# Altium PCB PCB2.PcbDoc (part 1 of 3)
Units mm, origin at the board's own origin, x right, y up, seen from the top; angles counter-clockwise.
Board outline 98.9 x 50 mm, 4 copper layers (Top Copper, Signal Layer 1, Signal Layer 2, Bottom Copper), stack 1.564 mm thick; 154 components, 109 nets, 647 pads, 921 vias.
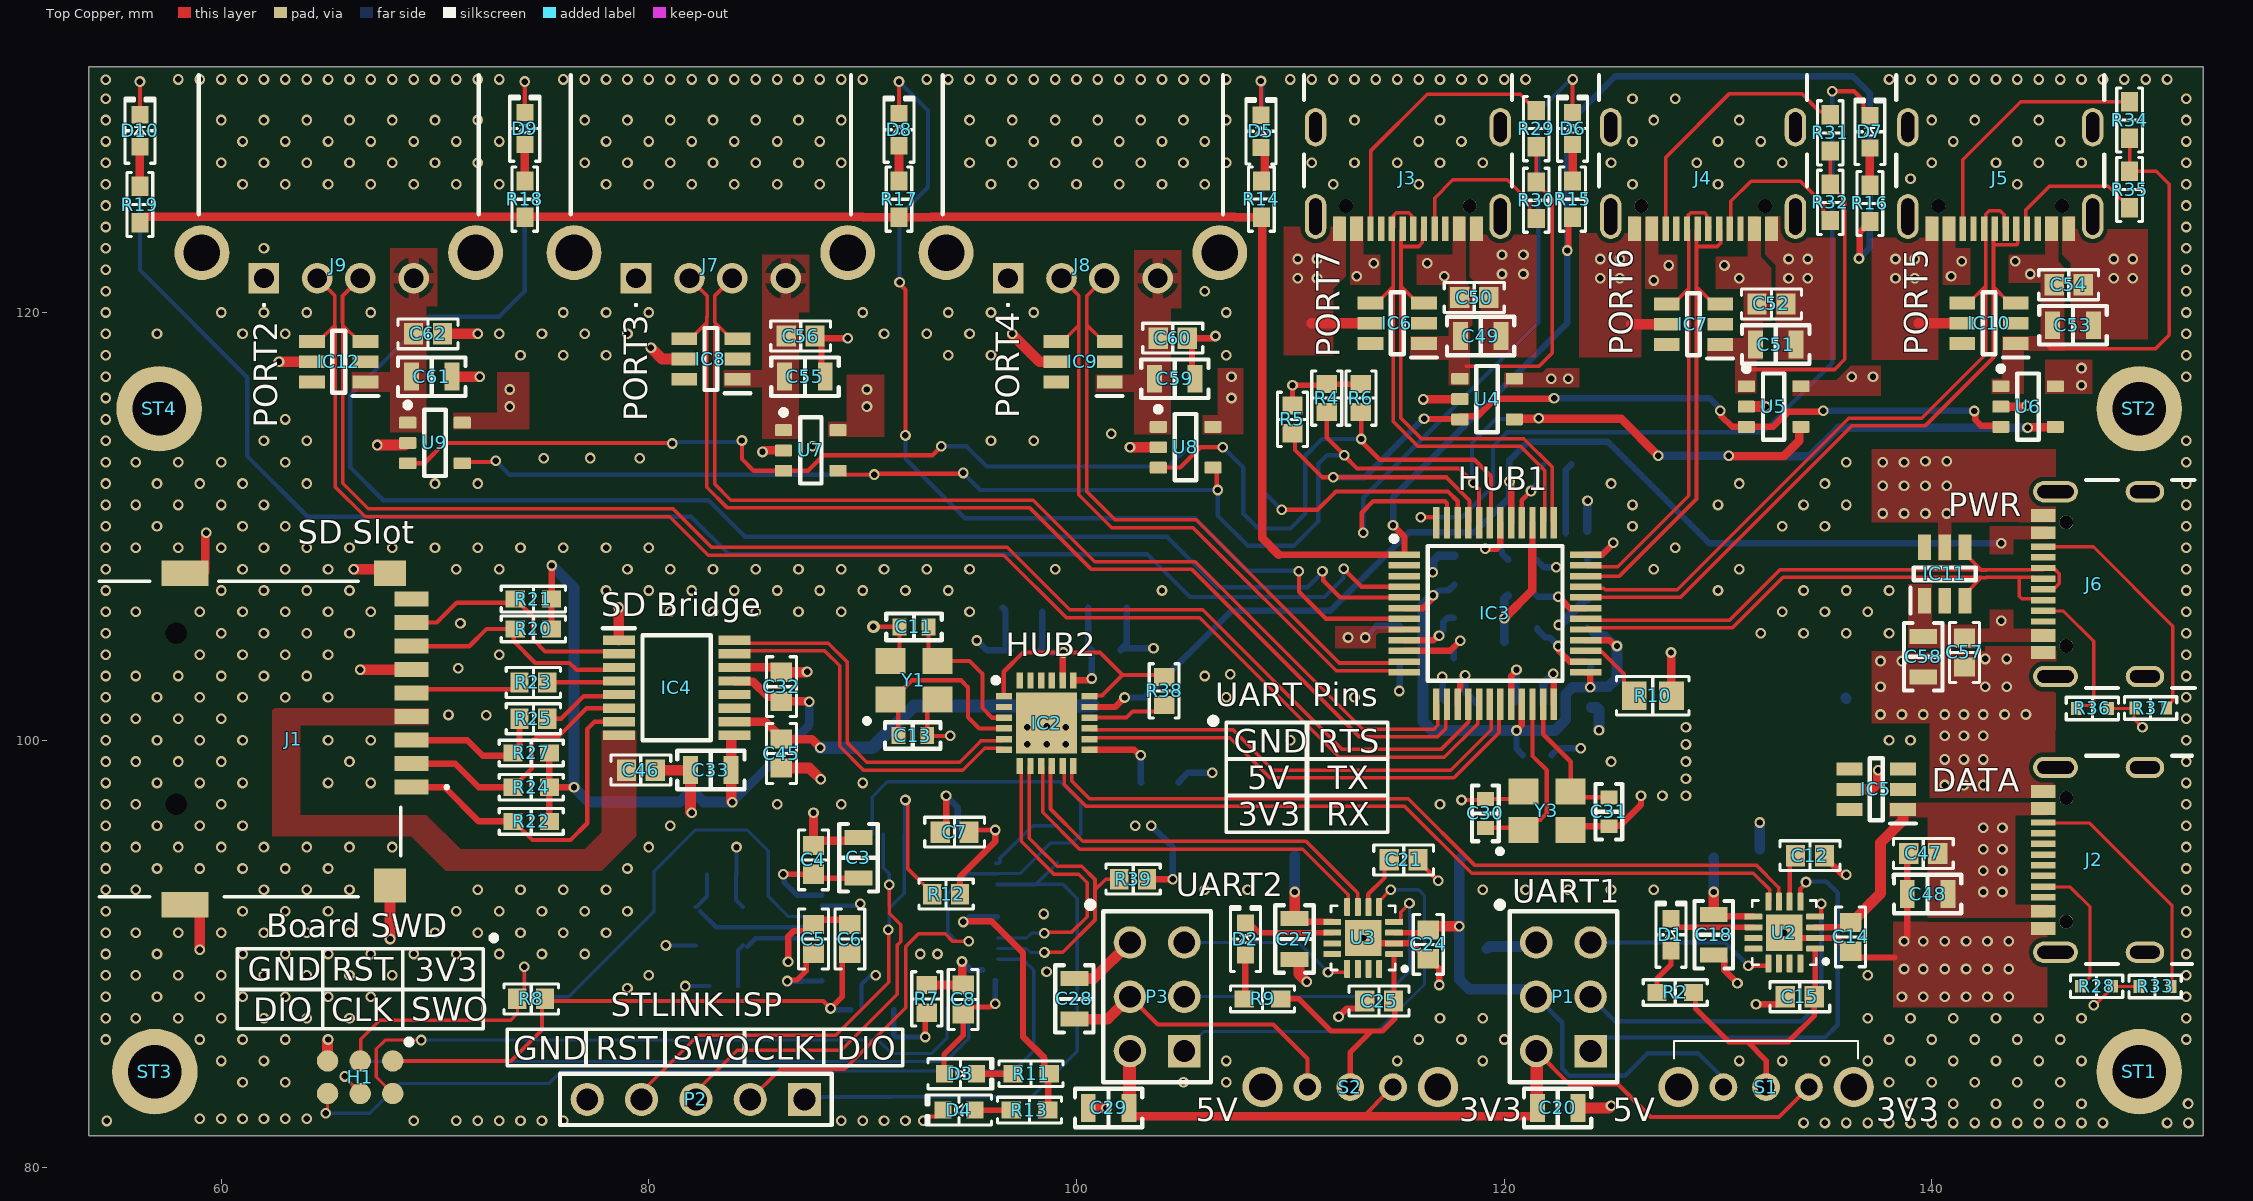
[diagram p0: Top Copper view]
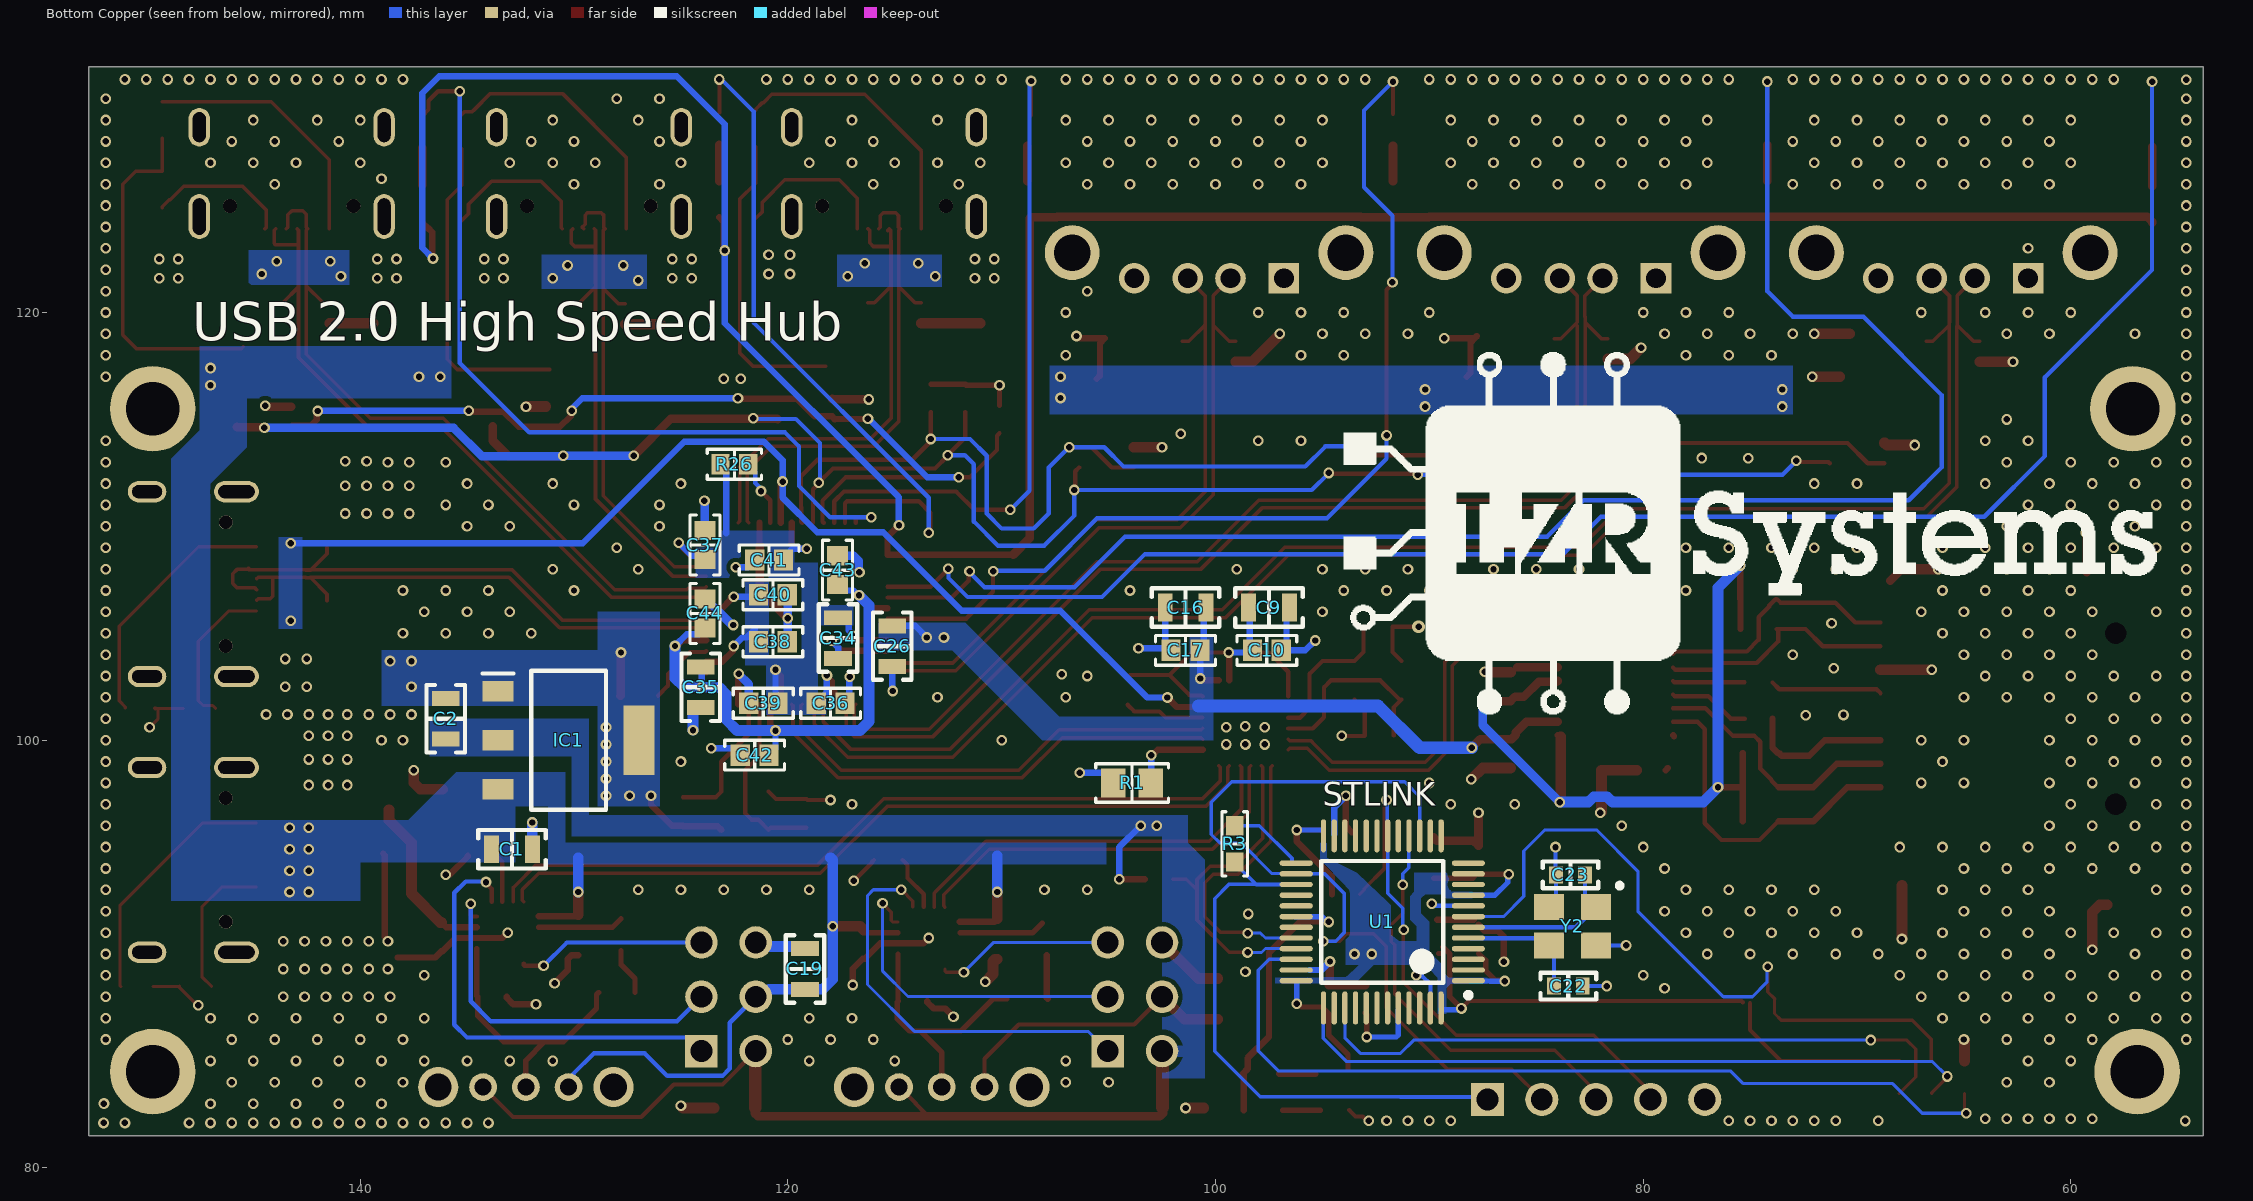
[diagram p1: Bottom Copper view, seen from below]
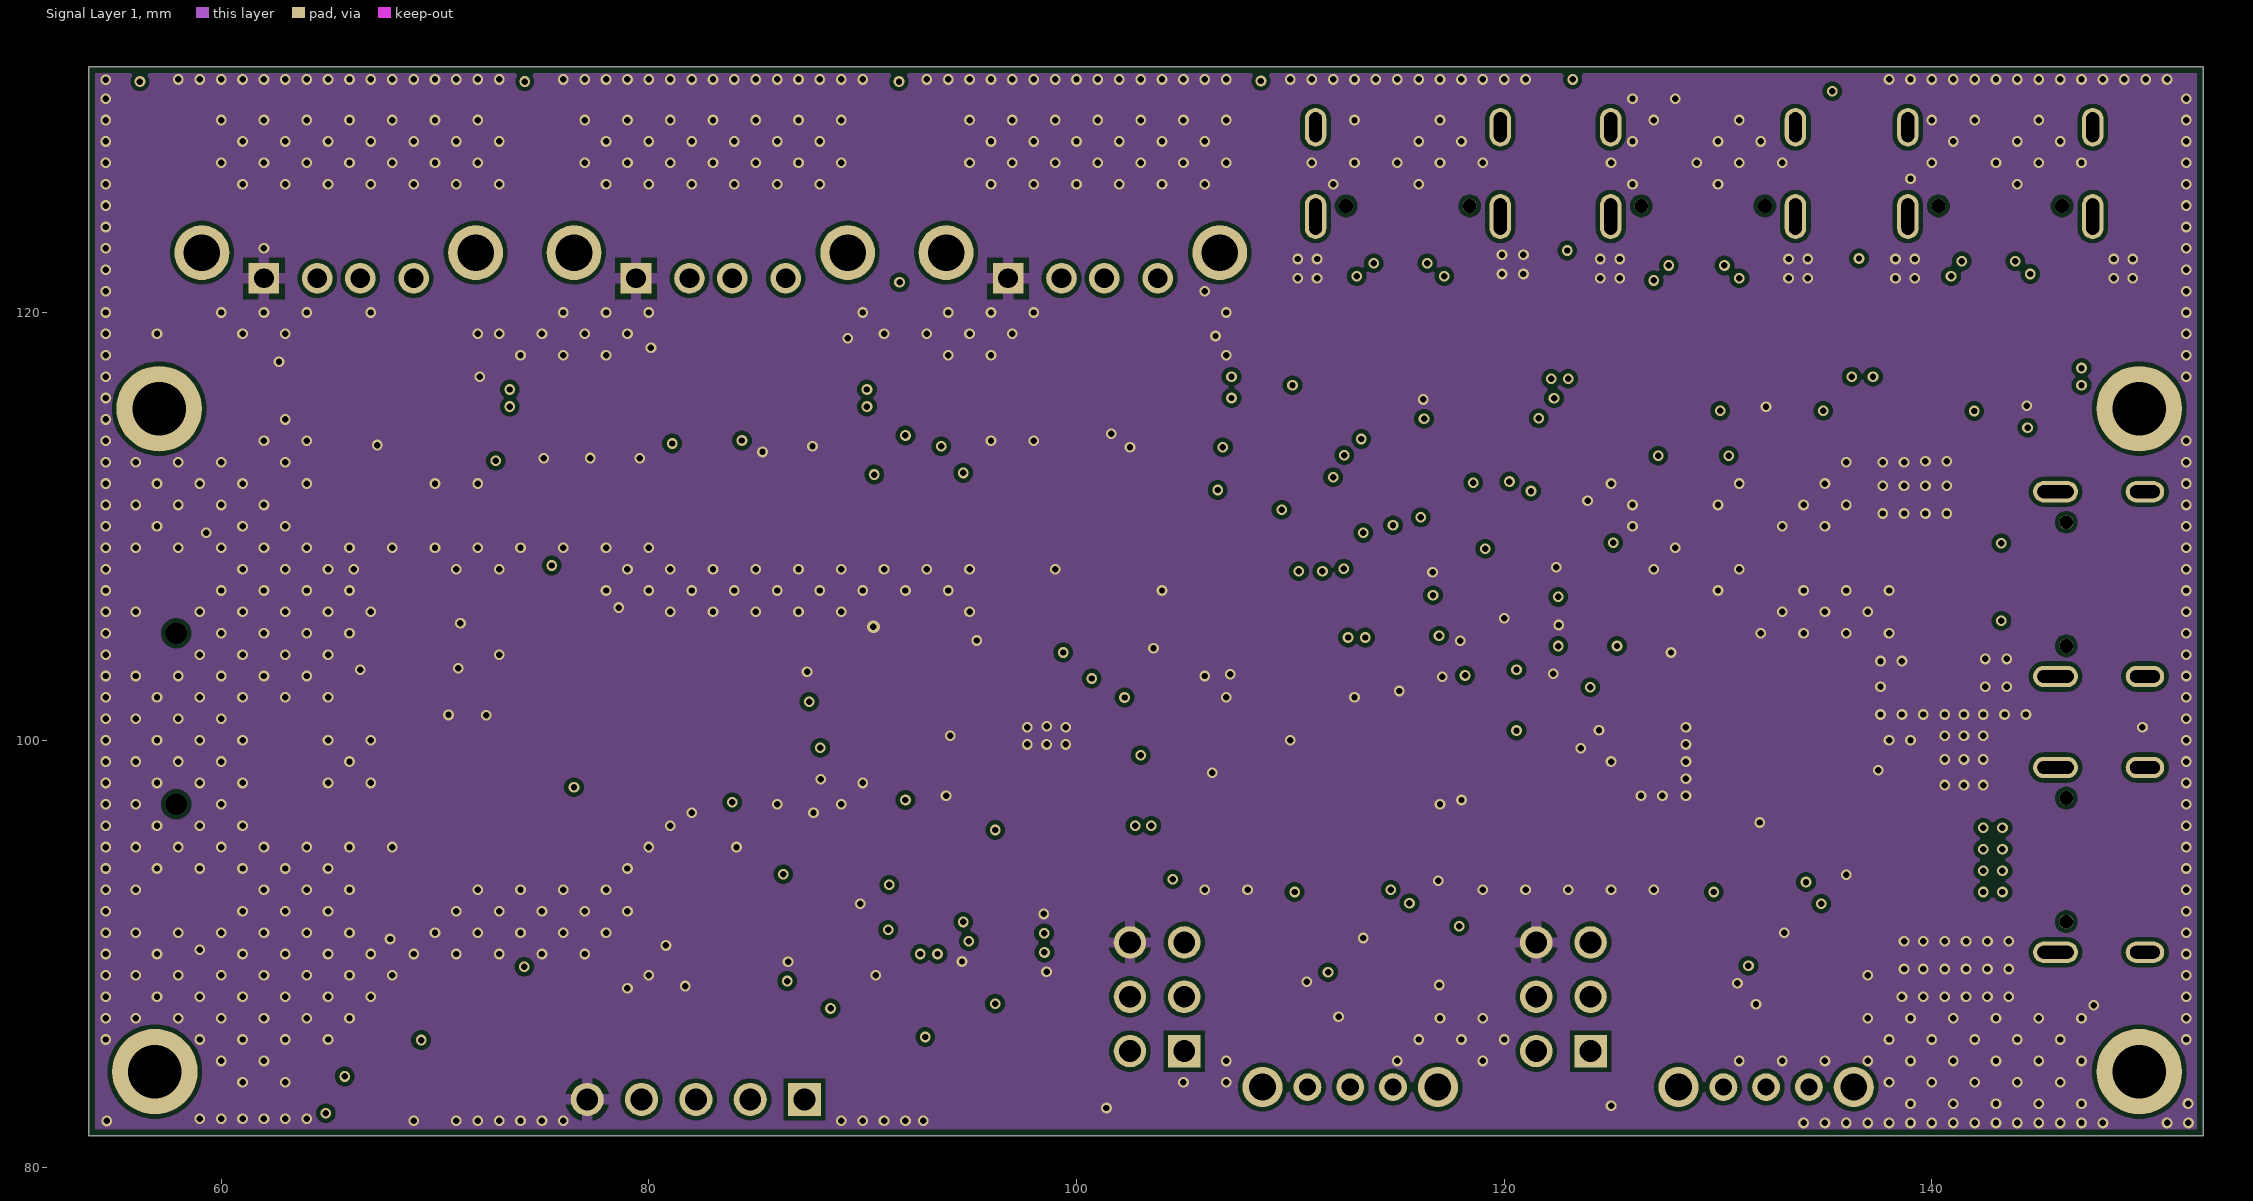
[diagram p2: Signal Layer 1]
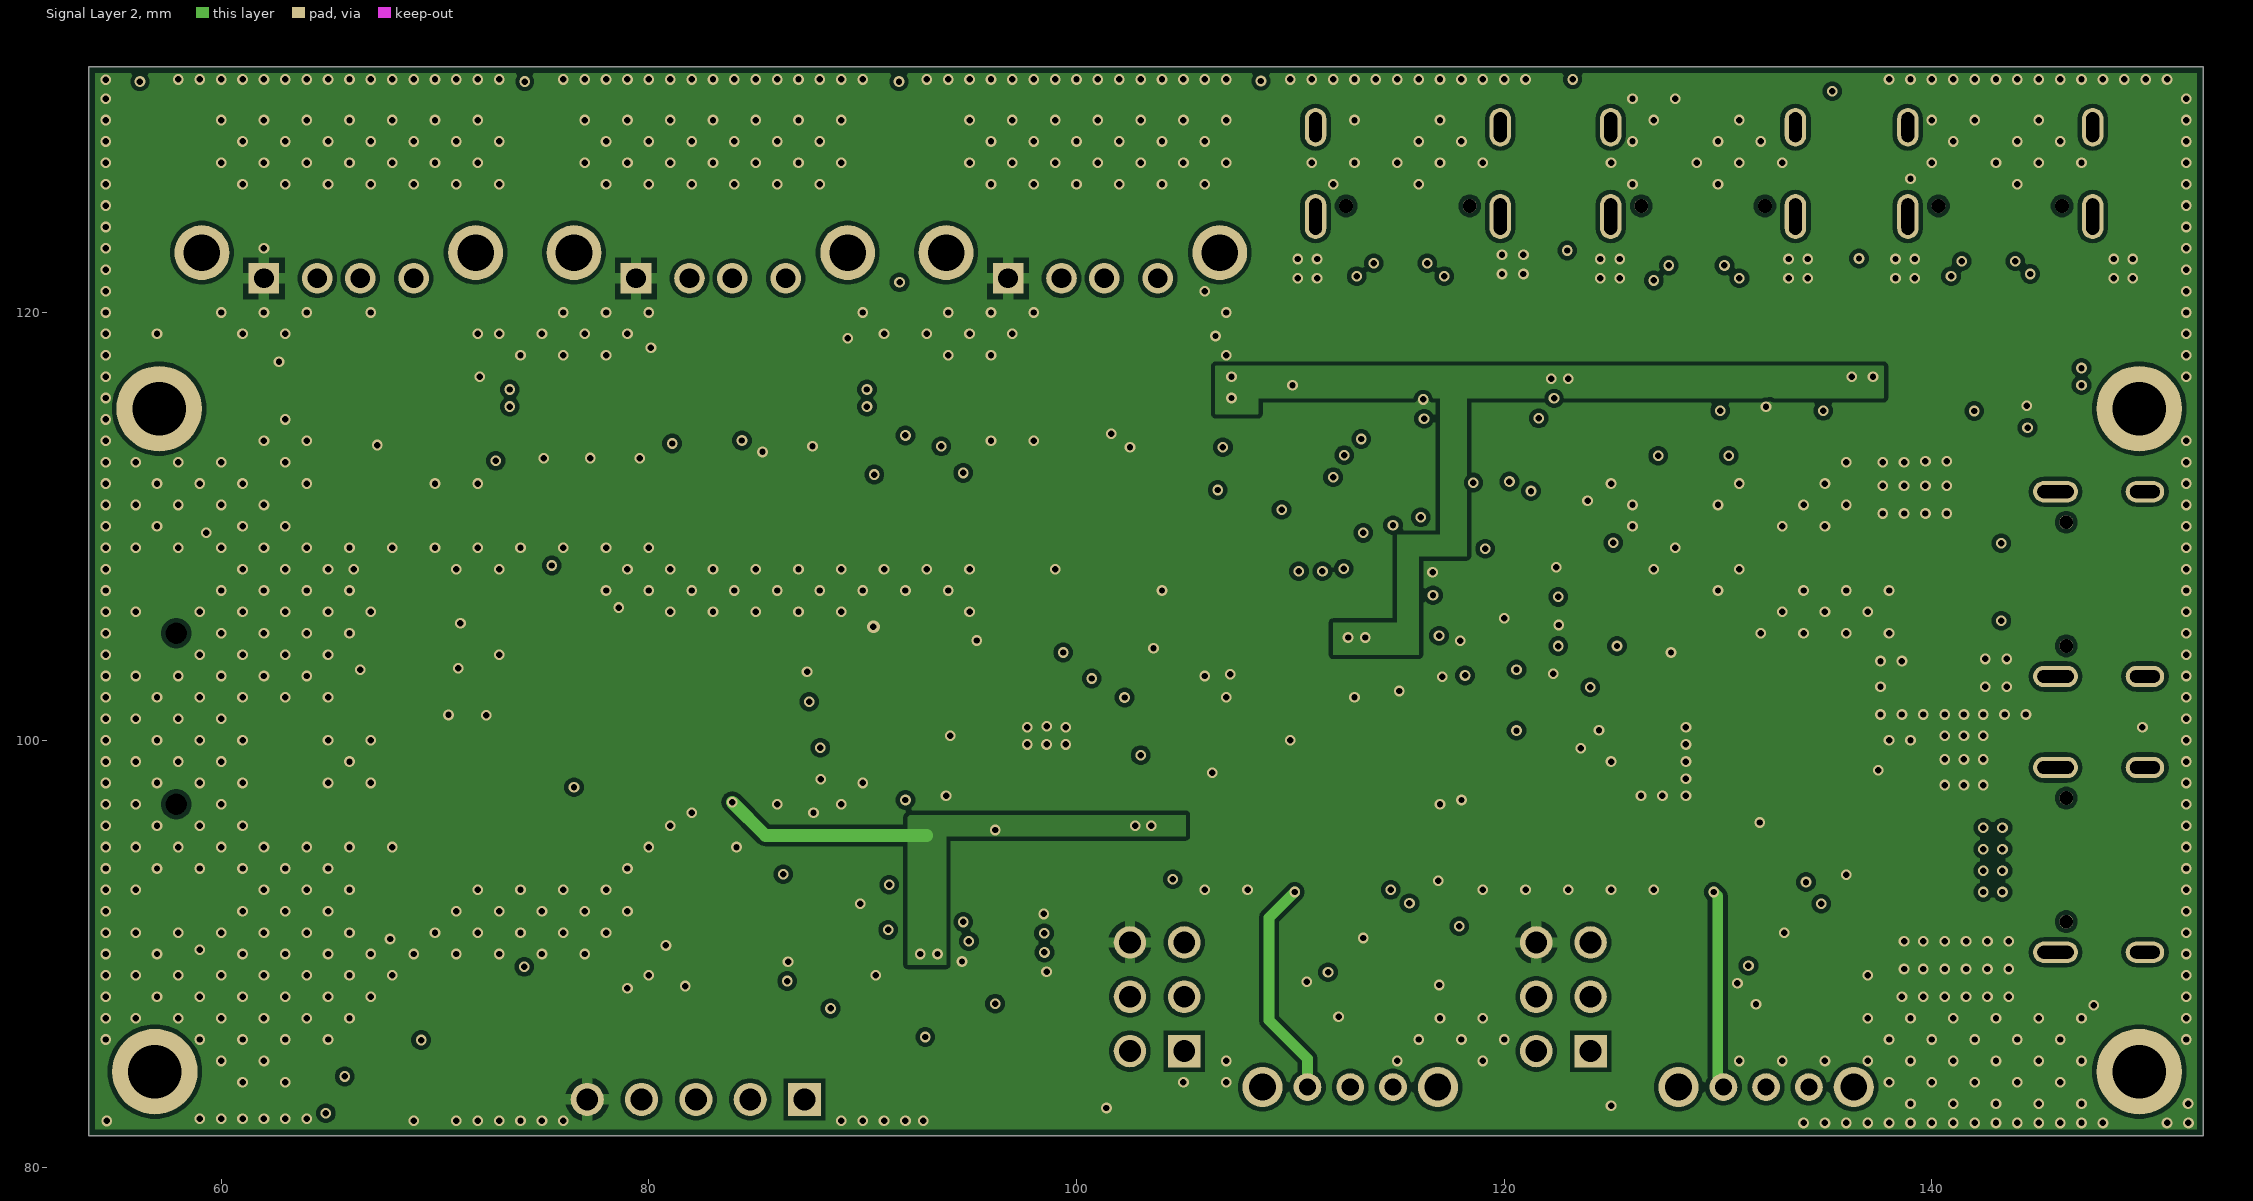
[diagram p3: Signal Layer 2]
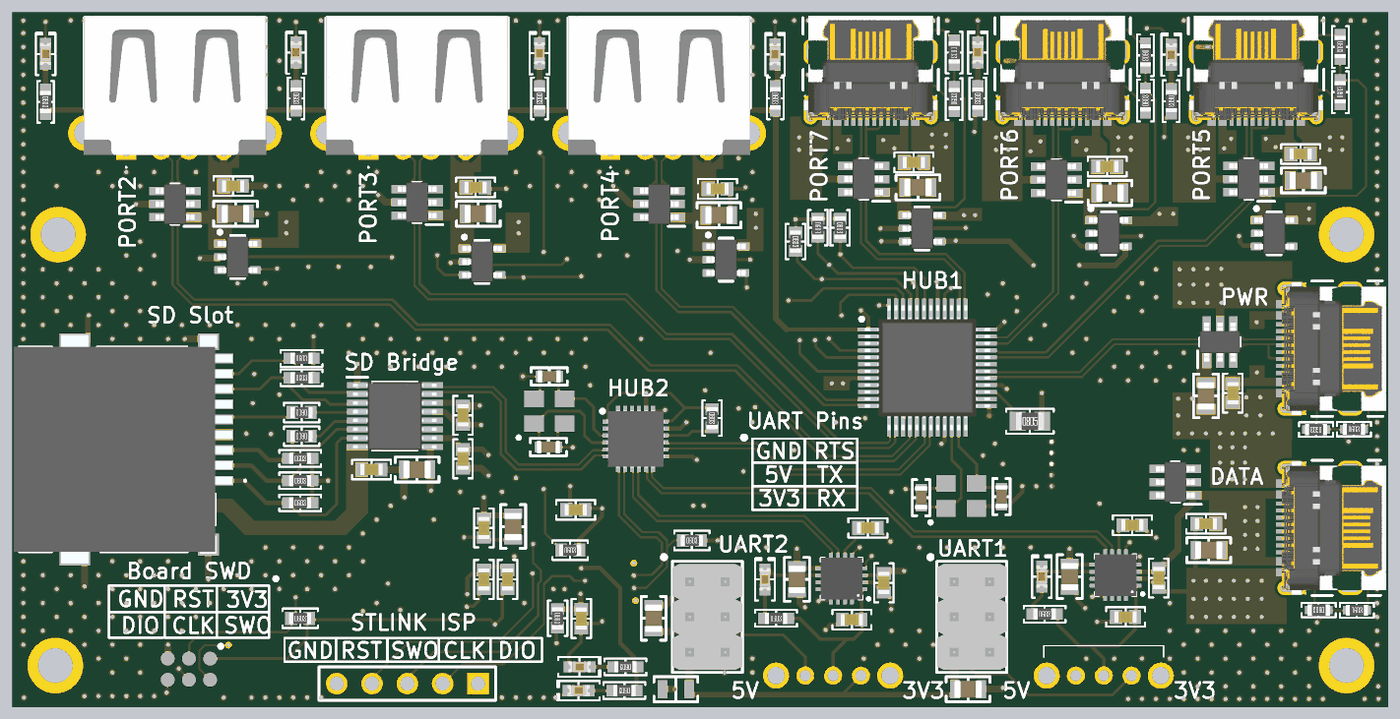
[diagram p5: 3D render of the assembled board from above, using the file's embedded part models]
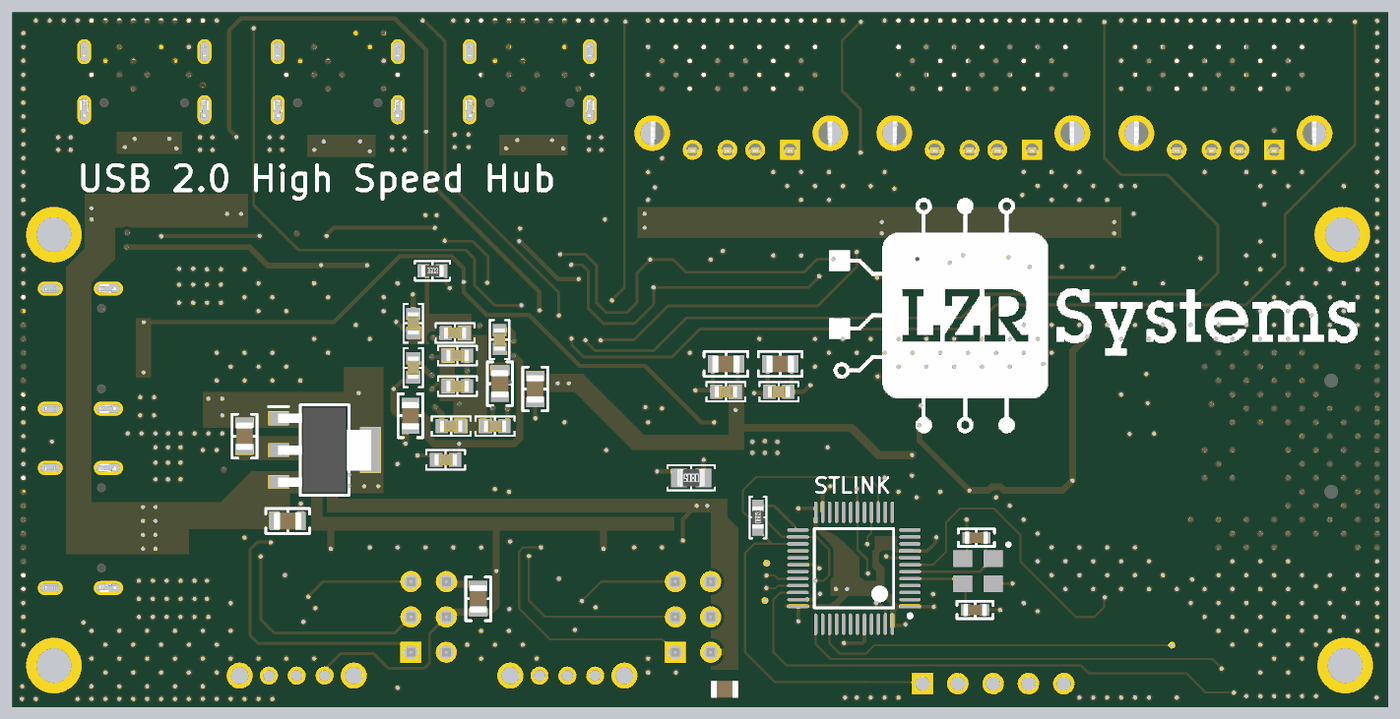
[diagram p6: 3D render of the assembled board from below, using the file's embedded part models]

## Layer stack, top to bottom
Top Mask: solder mask 0.015, Solder Resist, Dk 3.8
Top Copper: signal copper 0.035
Dielectric 1: prepreg 0.0994, 3313, Dk 4.05
Signal Layer 1: signal copper 0.0152
Core: core 1.265, FR-4, Dk 4.5
Signal Layer 2: signal copper 0.0152
Dielectric 2: prepreg 0.0994, 3313, Dk 4.05
Bottom Copper: signal copper 0.035
Bottom Mask: solder mask 0.015, Solder Resist, Dk 3.8

## Board outline
53.8,81.5 53.8,131.5 152.7,131.5 152.7,81.5

## Design rules (kind name [scope] priority, off if disabled: settings)
BoardOutlineClearance [All] p1: gap=0.3 ignorepadtopadclearanceinfootprint=FALSE except(0.4: Arc-SplitBarrior Arc-SplitContinuation Track-SplitBarrior Track-SplitContinuation SMDPad-SplitBarrior SMDPad-SplitContinuation THPad-SplitBarrior THPad-SplitContinuation Via-SplitBarrior Via-SplitContinuation Fill-SplitBarrior Fill-SplitContinuation Poly-SplitBarrior Poly-SplitContinuation Region-SplitBarrior Region-SplitContinuation Text-SplitBarrior Text-SplitContinuation)
Clearance "Clearance Different Nets" [All] p1: gap=0.2 ignorepadtopadclearanceinfootprint=FALSE except(0.089: Arc-Arc Arc-Track Arc-SMDPad Track-Track Track-SMDPad; 0.127: SMDPad-SMDPad SMDPad-Via THPad-Via Via-Via; 0.254: Arc-Via Arc-Text Track-Via Track-Text SMDPad-Text THPad-Text Via-Text Fill-Text Poly-Text Region-Text Text-Text; 0.5: THPad-THPad Via-Hole)
Clearance "Clearance Same Nets" [All] p2: gap=0.2 ignorepadtopadclearanceinfootprint=TRUE except(0: SMDPad-Via SMDPad-Hole; 0.089: Arc-Arc Arc-Track Arc-SMDPad Track-Track Track-SMDPad SMDPad-SMDPad; 0.127: THPad-Via; 0.254: Arc-Via Arc-Text Track-Via Track-Text SMDPad-Text THPad-Text Via-Via Via-Text Fill-Text Poly-Text Region-Text Text-Text)
Clearance "Clearance Bottom Layer" [OnLayer('Bottom Layer')] p3: gap=0.203 ignorepadtopadclearanceinfootprint=TRUE except(0.254: Arc-Text Track-Text SMDPad-Text THPad-Text Via-Text Fill-Text Poly-Text Region-Text Text-Text)
Clearance "Clearance Top Layer" [OnLayer('Top Layer')] p4: gap=0.203 ignorepadtopadclearanceinfootprint=TRUE except(0.254: Arc-Text Track-Text SMDPad-Text THPad-Text Via-Text Fill-Text Poly-Text Region-Text Text-Text)
DiffPairsRouting [All] p1: maxlimit=0.25 minlimit=0.127 mostfreqgap=0.127 toplayer_mingap=0.2 toplayer_prefgap=0.2 toplayer_minwidth=0.166 toplayer_maxwidth=0.17 toplayer_prefwidth=0.166 midlayer1_maxgap=0.127 midlayer1_minwidth=0.11 midlayer1_maxwidth=0.11 midlayer1_prefwidth=0.11 midlayer2_maxgap=0.127 midlayer2_minwidth=0.11 midlayer2_maxwidth=0.11 midlayer2_prefwidth=0.11 bottomlayer_maxgap=0.127 bottomlayer_minwidth=0.138 bottomlayer_maxwidth=0.138 bottomlayer_prefwidth=0.138 impedanceprofiledriven=TRUE impedanceprofileid={169C7CBD-F770-4E2C-8503-F8C298803404} impedanceprofilevalue=90.000000 maxuncoupledlength=30
HoleSize [All] p1: absolutevalues=TRUE maxlimit=6.3 minlimit=0.2 maxpercent=80.000 minpercent=20.000
MinimumAnnularRing [All] p1: minimumring=0.01
MinimumSolderMaskSliver [All] p1: minsoldermaskwidth=0.1
PolygonConnect PolygonConnect_1 [All] p1: thpad.connectstyle=Relief thpad.reliefconductorwidth=0.508 thpad.reliefentries=4 thpad.polygonreliefangle="90 Angle" thpad.airgapwidth=0.254 smdpad.connectstyle=Direct smdpad.reliefconductorwidth=0.508 smdpad.reliefentries=4 smdpad.polygonreliefangle="90 Angle" smdpad.airgapwidth=0.254 via.connectstyle=Direct via.reliefconductorwidth=0.508 via.reliefentries=4 via.polygonreliefangle="90 Angle" via.airgapwidth=0.254
RoutingCorners [All] p1: cornerstyle=Round minsetback=2.54 maxsetback=2.54
RoutingVias [All] p1: holewidth=0.5 width=1 viastyle="Through Hole" minholewidth=0.2 minwidth=0.35 maxholewidth=1 maxwidth=2
SilkToSilkClearance [All] p1: silktosilkclearance=0.1
SilkToSolderMaskClearance [IsPad] p1: minsilkscreentomaskgap=0.1 clearancetoexposedcopper=TRUE
SolderMaskExpansion [All] p1: expansion=0.03 istentingtop=FALSE
SupplyNets "Schematic Supply Nets_10" [InNet('+3V3')] p1: voltage=0.000
SupplyNets "Schematic Supply Nets_9" [InNet('GND')] p2: voltage=0.000
SupplyNets "Schematic Supply Nets_8" [InNet('+VCARD')] p3: voltage=0.000
SupplyNets "Schematic Supply Nets_7" [InNet('+5V_PORT6')] p4: voltage=0.000
SupplyNets "Schematic Supply Nets_6" [InNet('+5V_PORT2')] p5: voltage=0.000
SupplyNets "Schematic Supply Nets_5" [InNet('+5V_PORT3')] p6: voltage=0.000
SupplyNets "Schematic Supply Nets_4" [InNet('+5V_PORT7')] p7: voltage=0.000
SupplyNets "Schematic Supply Nets_3" [InNet('+5V_UPSTREAM')] p8: voltage=0.000
SupplyNets "Schematic Supply Nets_2" [InNet('+5V_PORT5')] p9: voltage=0.000
SupplyNets "Schematic Supply Nets_1" [InNet('+5V_PORT4')] p10: voltage=0.000
SupplyNets "Schematic Supply Nets" [InNet('+5V')] p11: voltage=0.000
Width [All] p1: maxlimit=2.54 minlimit=0.089 preferedwidth=0.381
24 further rules are at their usual default settings.

## Classes and differential pairs
component class U_Connectors: C47 C48 C49 C50 C51 C52 C53 C54 C55 C56 C57 C58 C59 C60 C61 C62 IC5 IC6 IC7 IC8 IC9 IC10 IC11 IC12 J2 J3 J4 J5 J6 J7 J8 J9 R28 R29 R30 R31 R32 R33 R34 R35 R36 R37 U4 U5 U6 U7 U8 U9
component class Main: C1 C2 C3 C4 C5 C6 C7 C8 C9 C10 C11 C12 C13 C14 C15 C16 C17 C18 C19 C20 C21 C22 C23 C24 C25 C26 C27 C28 C29 C30 C31 C32 C33 C34 C35 C36 C37 C38 C39 C40 C41 C42 C43 C44 C45 C46 D1 D2 D3 D4 D5 D6 D7 D8 D9 D10 H1 IC1 IC2 IC3 IC4 J1 P1 P2 P3 R1 R2 R3 R4 R5 R6 R7 R8 R9 R10 R11 R12 R13 R14 R15 R16 R17 R18 R19 R20 R21 R22 R23 R24 R25 R26 R27 R38 R39 S1 S2 ST1 ST2 ST3 ST4 U1 U2 U3 Y1 Y2 Y3
differential pair P11_D: +P11_D_P -P11_D_N
differential pair UP_D: +UP_D_P -UP_D_N
differential pair P10_D: +P10_D_P -P10_D_N
differential pair P9_D: +P9_D_P -P9_D_N
differential pair P8_D: +P8_D_P -P8_D_N
differential pair P7_D: +P7_D_P -P7_D_N
differential pair P6_D: +P6_D_P -P6_D_N
differential pair P5_D: +P5_D_P -P5_D_N
differential pair P4_D: +P4_D_P -P4_D_N
differential pair P3_D: +P3_D_P -P3_D_N
differential pair P2_D: +P2_D_P -P2_D_N
differential pair P1_D: +P1_D_P -P1_D_N

## Components (designator, comment, footprint, x,y, rotation, side; value= is the part's Value field where it differs from the comment)
C1 "10 µF" "MURATA GRM21B 0805_2012" 132.9,94.9 r0 bottom
C2 "10 µF" "MURATA GRM21B 0805_2012" 136,101 r270 bottom
C3 "10 µF" "MURATA GRM21B 0805_2012" 89.8,94.5 r270 top
C4 "0.1 µF" "CAP 0603_1608" 87.7,94.4 r270 top
C5 "0.1 µF" "CAP 0603_1608" 87.7,90.7 r270 top
C6 "0.1 µF" "CAP 0603_1608" 89.4,90.7 r270 top
C7 "0.1 µF" "CAP 0603_1608" 94.3,95.7 r0 top
C8 "0.1 µF" "CAP 0603_1608" 94.7,87.875 r270 top
C9 "10 µF" "MURATA GRM21B 0805_2012" 97.5,106.2 r0 bottom
C10 "0.1 µF" "CAP 0603_1608" 97.6,104.2 r180 bottom
C11 "10 pF" "MURATA GCM188 0603_1608" 92.4,105.3 r180 top
C12 "0.1 µF" "CAP 0603_1608" 134.3,94.6 r180 top
C13 "10 pF" "MURATA GCM188 0603_1608" 92.343,100.218 r0 top
C14 "0.1 µF" "CAP 0603_1608" 136.2,90.8 r90 top
C15 "0.1 µF" "CAP 0603_1608" 133.825,88 r180 top
C16 "10 µF" "MURATA GRM21B 0805_2012" 101.4,106.2 r180 bottom
C17 "0.1 µF" "CAP 0603_1608" 101.4,104.2 r0 bottom
C18 "10 µF" "MURATA GRM21B 0805_2012" 129.8,90.9 r90 top
C19 "10 µF" "MURATA GRM21B 0805_2012" 119.2,89.3 r270 bottom
C20 "10 µF" "MURATA GRM21B 0805_2012" 122.5,82.8 r180 top
C21 "0.1 µF" "CAP 0603_1608" 115.3,94.4 r180 top
C22 "10 pF" "MURATA GCM188 0603_1608" 83.5,88.5 r0 bottom
C23 "10 pF" "MURATA GCM188 0603_1608" 83.4,93.7 r180 bottom
C24 "0.1 µF" "CAP 0603_1608" 116.45,90.45 r90 top
C25 "0.1 µF" "CAP 0603_1608" 114.15,87.8 r180 top
C26 "10 µF" "MURATA GRM21B 0805_2012" 115.114,104.398 r90 bottom
C27 "10 µF" "MURATA GRM21B 0805_2012" 110.2,90.7 r90 top
C28 "10 µF" "MURATA GRM21B 0805_2012" 99.9,87.9 r270 top
C29 "10 µF" "MURATA GRM21B 0805_2012" 101.5,82.8 r0 top
C30 "10 pF" "MURATA GCM188 0603_1608" 119.125,96.575 r270 top
C31 "10 pF" "MURATA GCM188 0603_1608" 124.9,96.65 r90 top
C32 "0.1 µF" "CAP 0603_1608" 86.2,102.5 r270 top
C33 "10 µF" "MURATA GRM21B 0805_2012" 82.9,98.6 r0 top
C34 "10 µF" "MURATA GRM21B 0805_2012" 117.65,104.775 r90 bottom
C35 "10 µF" "MURATA GRM21B 0805_2012" 124.075,102.475 r90 bottom
C36 "0.1 µF" "CAP 0603_1608" 118,101.725 r180 bottom
C37 "0.1 µF" "CAP 0603_1608" 123.875,109.125 r90 bottom
C38 "0.1 µF" "CAP 0603_1608" 120.7,104.6 r180 bottom
C39 "0.1 µF" "CAP 0603_1608" 121.15,101.725 r0 bottom
C40 "0.1 µF" "CAP 0603_1608" 120.7,106.8 r180 bottom
C41 "0.1 µF" "CAP 0603_1608" 120.875,108.425 r0 bottom
C42 "0.1 µF" "CAP 0603_1608" 121.55,99.3 r0 bottom
C43 "0.1 µF" "CAP 0603_1608" 117.675,107.95 r90 bottom
C44 "0.1 µF" "CAP 0603_1608" 123.875,105.925 r90 bottom
C45 "0.1 µF" "CAP 0603_1608" 86.2,99.375 r90 top
C46 "0.1 µF" "CAP 0603_1608" 79.625,98.6 r180 top
C47 "0.1 µF" "CAP 0603_1608" 139.6,94.7 r0 top
C48 "10 µF" "MURATA GRM21B 0805_2012" 139.8,92.8 r0 top
C49 "10 µF" "MURATA GRM21B 0805_2012" 118.9,118.9 r180 top
C50 "0.1 µF" "CAP 0603_1608" 118.6,120.7 r180 top
C51 "10 µF" "MURATA GRM21B 0805_2012" 132.7,118.5 r180 top
C52 "0.1 µF" "CAP 0603_1608" 132.5,120.4 r180 top
C53 "10 µF" "MURATA GRM21B 0805_2012" 146.6,119.4 r180 top
C54 "0.1 µF" "CAP 0603_1608" 146.4,121.3 r180 top
C55 "10 µF" "MURATA GRM21B 0805_2012" 87.3,117 r180 top
C56 "0.1 µF" "CAP 0603_1608" 87.1,118.9 r180 top
C57 "0.1 µF" "CAP 0603_1608" 141.525,104.1 r90 top
C58 "10 µF" "MURATA GRM21B 0805_2012" 139.6,103.9 r90 top
C59 "10 µF" "MURATA GRM21B 0805_2012" 104.6,116.9 r180 top
C60 "0.1 µF" "CAP 0603_1608" 104.5,118.8 r180 top
C61 "10 µF" "MURATA GRM21B 0805_2012" 69.85,117 r180 top
C62 "0.1 µF" "CAP 0603_1608" 69.675,119 r180 top
D1 "RED" "LED 0603_1608 RED" 127.8,90.9 r90 top
D2 "RED" "LED 0603_1608 RED" 107.9,90.7 r90 top
D3 "GREEN" "LED 0603_1608 RED" 94.575,84.4 r0 top
D4 "RED" "LED 0603_1608 RED" 94.5,82.7 r180 top
D5 "GREEN" "LED 0603_1608 RED" 108.625,128.475 r90 top
D6 "GREEN" "LED 0603_1608 RED" 123.2,128.6 r90 top
D7 "GREEN" "LED 0603_1608 RED" 137.1,128.45 r90 top
D8 "GREEN" "LED 0603_1608 RED" 91.7,128.55 r90 top
D9 "GREEN" "LED 0603_1608 RED" 74.2,128.6 r90 top
D10 "GREEN" "LED 0603_1608 RED" 56.2,128.5 r90 top
H1 "6 pin pad" "6 pin pad-Footprint-1" 68.024,85 r270 top
IC1 "AMS1117-3.3" SOT229P700X180-4N 130.25,100 r180 bottom
IC2 "FE1.1S-BQFN24B" QFN50P400X400X80-25N-D 98.6,100.8 r0 top
IC3 "FE2.1_QFP" QFP50P900X900X160-48N 119.575,105.925 r0 top
IC4 "GL823K-HCY04" SOP64P600X175-16N 81.3,102.45 r0 top
IC5 "TPD4E001RDBVR" SOT95P280X145-6N 137.4,97.7 r180 top
IC6 "TPD4E001RDBVR" SOT95P280X145-6N 115,119.5 r180 top
IC7 "TPD4E001RDBVR" SOT95P280X145-6N 128.85,119.45 r180 top
IC8 "TPD4E001RDBVR" SOT95P280X145-6N 82.9,117.825 r180 top
IC9 "TPD4E001RDBVR" SOT95P280X145-6N 100.3,117.7 r180 top
IC10 "TPD4E001RDBVR" SOT95P280X145-6N 142.675,119.5 r180 top
IC11 "TPD4E001RDBVR" SOT95P280X145-6N 140.6,107.775 r90 top
IC12 "TPD4E001RDBVR" SOT95P280X145-6N 65.5,117.7 r180 top
J1 "TF_PUSH" TFPUSH 61.15,100.05 r270 top
J2 "USB4105-GF-A" FP-USB4105-GF-A-MFG 148.8,94.4 r90 top
J3 "USB4105-GF-A" FP-USB4105-GF-A-MFG 115.5,127.5 r180 top
J4 "USB4105-GF-A" FP-USB4105-GF-A-MFG 129.3,127.5 r180 top
J5 "USB4105-GF-A" FP-USB4105-GF-A-MFG 143.2,127.5 r180 top
J6 "USB4105-GF-A" FP-USB4105-GF-A-MFG 148.8,107.3 r90 top
J7 "USB1125-GF-B" USB1125GFB 79.4,121.6 r180 top
J8 "USB1125-GF-B" USB1125GFB 96.8,121.6 r180 top
J9 "USB1125-GF-B" USB1125GFB 62,121.6 r180 top
P1 "MTLW-103-06-G-D-180" SMTC-MTLW-103-06-X-D-180 124.04,85.46 r90 top
P2 "77311-462K05LF" FCI-77311-5_V 82.2,83.2 r180 top
P3 "MTLW-103-06-G-D-180" SMTC-MTLW-103-06-X-D-180 105.04,85.46 r90 top
R1 "2.7 kOhms" "RES 0805_2012" 103.9,98 r0 bottom
R2 "1 kOhms" "YAGEO RES 0603_1608" 128,88.2 r0 top
R3 "DNP" "YAGEO RES 0603_1608" 99.1,95.15 r90 bottom
R4 "10 k" "RES 0603_1608" 111.7,116 r270 top
R5 "10 k" "RES 0603_1608" 110.1,115 r270 top
R6 "10 k" "RES 0603_1608" 113.3,116 r270 top
R7 "10 kOhms" "RES 0603_1608" 93,87.9 r270 top
R8 "10 kOhms" "RES 0603_1608" 74.5,87.9 r0 top
R9 "1 kOhms" "YAGEO RES 0603_1608" 108.7,87.9 r0 top
R10 "2.7 kOhms" "RES 0805_2012" 126.95,102.075 r0 top
R11 "1 kOhms" "YAGEO RES 0603_1608" 97.875,84.4 r180 top
R12 "10 kOhms" "RES 0603_1608" 93.9,92.8 r0 top
R13 "1 kOhms" "YAGEO RES 0603_1608" 97.8,82.7 r180 top
R14 "1 kOhms" "YAGEO RES 0603_1608" 108.643,125.304 r270 top
R15 "1 kOhms" "YAGEO RES 0603_1608" 123.2,125.3 r270 top
R16 "1 kOhms" "YAGEO RES 0603_1608" 137.1,125.1 r270 top
R17 "1 kOhms" "YAGEO RES 0603_1608" 91.7,125.3 r270 top
R18 "1 kOhms" "YAGEO RES 0603_1608" 74.2,125.3 r270 top
R19 "1 kOhms" "YAGEO RES 0603_1608" 56.2,125.05 r270 top
R20 "51 k" "YAGEO RES 0603_1608" 74.6,105.2 r0 top
R21 "51 k" "YAGEO RES 0603_1608" 74.6,106.6 r0 top
R22 "51 k" "YAGEO RES 0603_1608" 74.5,96.2 r0 top
R23 "22R" "RES 0603_1608" 74.6,102.7 r180 top
R24 "51 k" "YAGEO RES 0603_1608" 74.5,97.8 r0 top
R25 "22R" "RES 0603_1608" 74.6,101 r180 top
R26 "10 kOhms" "RES 0603_1608" 122.5,112.9 r180 bottom
R27 "51 k" "YAGEO RES 0603_1608" 74.5,99.4 r0 top
R28 "5.1 kOhms" "KOA RES RK73 RN73 0603_1608" 147.703,88.492 r180 top
R29 "56 kOhms" "YAGEO RES 0603_1608" 121.5,128.6 r270 top
R30 "56 kOhms" "YAGEO RES 0603_1608" 121.5,125.25 r90 top
R31 "56 kOhms" "YAGEO RES 0603_1608" 135.25,128.4 r270 top
R32 "56 kOhms" "YAGEO RES 0603_1608" 135.25,125.15 r90 top
R33 "5.1 kOhms" "KOA RES RK73 RN73 0603_1608" 150.442,88.481 r0 top
R34 "56 kOhms" "YAGEO RES 0603_1608" 149.25,129 r270 top
R35 "56 kOhms" "YAGEO RES 0603_1608" 149.25,125.75 r90 top
R36 "5.1k" "KOA RES RK73 RN73 0603_1608" 147.508,101.481 r180 top
R37 "5.1k" "KOA RES RK73 RN73 0603_1608" 150.232,101.503 r0 top
R38 "10 kOhms" "RES 0603_1608" 104.1,102.3 r270 top
R39 "1.5 kOhms" "RES 0603_1608" 102.65,93.5 r0 top
S1 "SK12D07VG6NS" SK12D07VG6NS 130.25,83.775 r0 top
S2 "SK12D07VG6NS" SK12D07VG6NS 110.8,83.775 r0 top
ST1 "PTH-M2D5X5" PTH-M2D5X5 149.7,84.5 r0 top
ST2 "PTH-M2D5X5" PTH-M2D5X5 149.7,115.5 r0 top
ST3 "PTH-M2D5X5" PTH-M2D5X5 56.9,84.5 r0 top
ST4 "PTH-M2D5X5" PTH-M2D5X5 57.1,115.5 r0 top
U1 "STM32F103C8T6" STM-LQFP48_L 92.2,91.5 r0 bottom
U2 "CH343P" QFN50P300X300X80-17N 133.1,91 r180 top
U3 "CH343P" QFN50P300X300X80-17N 113.405,90.75 r180 top
U4 "TPS2051BDBVR" DBV0005A_L 119.2,115.95 r0 top
U5 "TPS2051BDBVR" DBV0005A_L 132.6,115.6 r0 top
U6 "TPS2051BDBVR" DBV0005A_L 144.5,115.6 r0 top
U7 "TPS2051BDBVR" DBV0005A_L 87.575,113.55 r0 top
U8 "TPS2051BDBVR" DBV0005A_L 105.1,113.7 r0 top
U9 "TPS2051BDBVR" DBV0005A_L 70,113.9 r0 top
Y1 "12MHz" "Yajingxin TX32258M4DBDD2T-Footprint-1" 92.4,102.8 r0 top
Y2 "8MHz" "Yajingxin TX32258M4DBDD2T-Footprint-1" 83.3,91.3 r0 bottom
Y3 "12MHz" "Yajingxin TX32258M4DBDD2T-Footprint-1" 122,96.7 r0 top

## Footprints (in the part's own frame and the unit in brackets; to place one, negate y for a bottom-side part, rotate by r counter-clockwise, add the part's x,y. Pads: shape width x height; smd on the part's side, far side on the other; paste and mask are expansions set on the pad)
"6 pin pad-Footprint-1" [mm]
  round 1 smd: 1(0,0) 2(0,-1.524) 3(0,-3.048) 4(1.524,-3.048) 5(1.524,-1.524) 6(1.524,0)
  silkscreen extent -1.02,0.64 -0.76,0.89
"CAP 0603_1608" [mm] "Chip Capacitor, 2-Leads, Body 1.60x0.80mm, IPC Medium Density"
  rect 0.9x1 smd: 1(-0.675,0) 2(0.675,0)
  silkscreen extent -1.4,-0.7 1.4,0.7, body extent -0.8,-0.41 0.8,0.41, height 0.82
DBV0005A_L [mm] "SOT23, 5-Leads, Body 3.05x1.75mm, Pitch 0.95mm, IPC High Density"
  rrect18% 0.8x0.55 smd: 1(-1.275,0.95) 2(-1.275,0) 3(-1.275,-0.95) 4(1.275,-0.95) 5(1.275,0.95)
  silkscreen extent -0.5,-1.55 0.5,1.55, body extent -1.42,-1.46 1.42,1.46, height 1.08
FCI-77311-5_V [mm] "THD, 5-Leads, Body 12.7x2.4mm, Pitch 2.54mm"
  rect 1.55x1.55 hole 1.02: 1(-5.08,0)
  round 1.55 hole 1.02: 2(-2.54,0) 3(0,0) 4(2.54,0) 5(5.08,0)
  silkscreen extent -6.35,-1.2 6.35,1.2, body extent -6.35,-1.2 6.35,1.2, height 16.24
FP-USB4105-GF-A-MFG [mm]
  rrect100% 1x2.1 hole 1.7 slot 0.6 at 0 deg paste-2539.97 mask+0: 1(-4.32,3.015) 2(4.32,3.015)
  rrect100% 1x1.8 hole 1.4 slot 0.6 at 0 deg paste-2539.97 mask+0: 3(-4.32,-1.165) 4(4.32,-1.165)
  rect 0.6x1.15 smd paste+0 mask+0: A1-B12(-3.2,3.59) A4-B9(-2.4,3.59) B1-A12(3.2,3.59) B4-A9(2.4,3.59)
  rect 0.3x1.15 smd paste+0 mask+0: A5(-1.25,3.59) A6(-0.25,3.59) A7(0.25,3.59) A8(1.25,3.59) B5(1.75,3.59) B6(0.75,3.59) B7(-0.75,3.59) B8(-1.75,3.59)
  round 0.65 hole 0.65 unplated paste-2539.97 mask+0: ""(-2.89,2.515) ""(2.89,2.515)
  silkscreen extent -4.86,-3.36 4.86,1.59, body extent -4.97,-3.94 4.97,4.27, height 0.25
"KOA RES RK73 RN73 0603_1608" [mm] "Chip Resistor, 2-Leads, Body 1.60x0.80mm"
  rect 0.5x0.6 smd: 1(-0.75,0) 2(0.75,0)
  silkscreen extent -1.23,-0.53 1.23,0.52, body extent -0.8,-0.4 0.8,0.4, height 0.45
"LED 0603_1608 RED" [mm] "Chip Diode, 2-Leads, Body 1.60x0.80mm, IPC Medium Density"
  rect 0.8x0.8 smd: 1(-0.75,0) 2(0.75,0)
  silkscreen extent -1.52,-0.7 1.52,0.7, body extent -0.8,-0.4 0.8,0.4, height 0.53
"MURATA GCM188 0603_1608" [mm] "Chip Capacitor, 2-Leads, Body 1.60x0.80mm"
  rect 0.65x0.8 smd: 1(-0.675,0) 2(0.675,0)
  silkscreen extent -1.3,-0.63 1.3,0.63, body extent -0.85,-0.45 0.85,0.45, height 0.9
"MURATA GRM21B 0805_2012" [mm] "Chip Capacitor, 2-Leads, Body 2.00x1.25mm"
  rect 0.7x1.3 smd: 1(-0.95,0) 2(0.95,0)
  silkscreen extent -1.58,-0.9 1.58,0.9, body extent -1,-0.63 1,0.63, height 1.25
PTH-M2D5X5 [mm]
  round 4 hole 2.5: 1(0,0)
QFN50P300X300X80-17N [mm]
  rrect25% 0.84x0.28 smd: 1(-1.445,0.75) 2(-1.445,0.25) 3(-1.445,-0.25) 4(-1.445,-0.75) 9(1.445,-0.75) 10(1.445,-0.25) 11(1.445,0.25) 12(1.445,0.75)
  rrect25% 0.28x0.84 smd: 5(-0.75,-1.445) 6(-0.25,-1.445) 7(0.25,-1.445) 8(0.75,-1.445) 13(0.75,1.445) 14(0.25,1.445) 15(-0.25,1.445) 16(-0.75,1.445)
  rect 1.7x1.7 smd paste-0.31: 17(0,0)
  silkscreen extent -2.04,-1.5 1.5,1.5, body extent -1.5,-1.5 1.5,1.5, height 0.8
QFN50P400X400X80-25N-D [mm]
  rect 0.75x0.3 smd: 1(-2,1.25) 2(-2,0.75) 3(-2,0.25) 4(-2,-0.25) 5(-2,-0.75) 6(-2,-1.25) 13(2,-1.25) 14(2,-0.75) 15(2,-0.25) 16(2,0.25) 17(2,0.75) 18(2,1.25)
  rect 0.3x0.75 smd: 7(-1.25,-2) 8(-0.75,-2) 9(-0.25,-2) 10(0.25,-2) 11(0.75,-2) 12(1.25,-2) 19(1.25,2) 20(0.75,2) 21(0.25,2) 22(-0.25,2) 23(-0.75,2) 24(-1.25,2)
  rect 2.85x2.85 smd: 25(0,0)
  silkscreen extent -2.5,1.88 -2.25,2.12, body extent -2.05,-2.05 2.05,2.05, height 0.8
QFP50P900X900X160-48N [mm]
  rect 1.475x0.3 smd: 1(-4.238,2.75) 2(-4.238,2.25) 3(-4.238,1.75) 4(-4.238,1.25) 5(-4.238,0.75) 6(-4.238,0.25) 7(-4.238,-0.25) 8(-4.238,-0.75) 9(-4.238,-1.25) 10(-4.238,-1.75) 11(-4.238,-2.25) 12(-4.238,-2.75) 25(4.238,-2.75) 26(4.238,-2.25) 27(4.238,-1.75) 28(4.238,-1.25) 29(4.238,-0.75) 30(4.238,-0.25) 31(4.238,0.25) 32(4.238,0.75) 33(4.238,1.25) 34(4.238,1.75) 35(4.238,2.25) 36(4.238,2.75)
  rect 0.3x1.475 smd: 13(-2.75,-4.238) 14(-2.25,-4.238) 15(-1.75,-4.238) 16(-1.25,-4.238) 17(-0.75,-4.238) 18(-0.25,-4.238) 19(0.25,-4.238) 20(0.75,-4.238) 21(1.25,-4.238) 22(1.75,-4.238) 23(2.25,-4.238) 24(2.75,-4.238) 37(2.75,4.238) 38(2.25,4.238) 39(1.75,4.238) 40(1.25,4.238) 41(0.75,4.238) 42(0.25,4.238) 43(-0.25,4.238) 44(-0.75,4.238) 45(-1.25,4.238) 46(-1.75,4.238) 47(-2.25,4.238) 48(-2.75,4.238)
  silkscreen extent -4.85,-3.15 3.15,3.62, body extent -4.5,-4.5 4.5,4.5, height 1.6
"RES 0603_1608" [mm] "Chip Resistor, 2-Leads, Body 1.60x0.80mm, IPC Medium Density"
  rect 0.85x0.95 smd: 1(-0.65,0) 2(0.65,0)
  silkscreen extent -1.27,-0.7 1.27,0.7, body extent -0.8,-0.4 0.8,0.4, height 0.45
"RES 0805_2012" [mm] "Chip Resistor, 2-Leads, Body 2.00x1.25mm, IPC Medium Density"
  rect 1.15x1.35 smd: 1(-0.875,0) 2(0.875,0)
  silkscreen extent -1.7,-0.9 1.7,0.9, body extent -1,-0.62 1,0.63, height 0.6
SK12D07VG6NS [mm]
  round 1.3 hole 0.8: 1(0,0) 2(2,0) 3(4,0)
  round 1.875 hole 1.25: MH1(-2.1,0) MH2(6.1,0)
  silkscreen extent -2.3,1.35 6.3,2.15
SMTC-MTLW-103-06-X-D-180 [mm] "Terminal Assembly, 2x3 Pins, Vertical, 2.54mm Pitch, Male"
  rect 1.52x1.52 hole 1.02: 1(0,0)
  round 1.52 hole 1.02: 2(0,2.54) 3(2.54,0) 4(2.54,2.54) 5(5.08,0) 6(5.08,2.54)
  silkscreen extent -1.46,-1.24 6.54,3.78, body extent -1.27,-1.24 6.35,3.78, height 6.1
SOP64P600X175-16N [mm]
  rect 1.5x0.435 smd: 1(-2.7,2.222) 2(-2.7,1.588) 3(-2.7,0.952) 4(-2.7,0.318) 5(-2.7,-0.318) 6(-2.7,-0.952) 7(-2.7,-1.588) 8(-2.7,-2.222) 9(2.7,-2.222) 10(2.7,-1.588) 11(2.7,-0.952) 12(2.7,-0.318) 13(2.7,0.318) 14(2.7,0.952) 15(2.7,1.588) 16(2.7,2.222)
  silkscreen extent -3.45,-2.45 1.6,2.79, body extent -3,-2.45 3,2.45, height 1.75
SOT95P280X145-6N [mm]
  rect 1.2x0.6 smd: 1(-1.25,0.95) 2(-1.25,0) 3(-1.25,-0.95) 4(1.25,-0.95) 5(1.25,0) 6(1.25,0.95)
  silkscreen extent -1.85,-1.45 0.3,1.6, body extent -1.4,-1.45 1.4,1.45, height 1.2
SOT229P700X180-4N [mm]
  rect 1.45x0.95 smd: 1(-3.3,2.29) 2(-3.3,0) 3(-3.3,-2.29)
  rect 1.45x3.25 smd: 4(3.3,0)
  silkscreen extent -4.02,-3.25 1.75,3.25, body extent -3.35,-3.15 3.35,3.15, height 1.8
STM-LQFP48_L [mm] "QFP, 48-Leads, Body 7x7mm, Pitch 0.5mm, IPC High Density"
  oval 1.55x0.25 smd: 1(-4.025,2.75) 2(-4.025,2.25) 3(-4.025,1.75) 4(-4.025,1.25) 5(-4.025,0.75) 6(-4.025,0.25) 7(-4.025,-0.25) 8(-4.025,-0.75) 9(-4.025,-1.25) 10(-4.025,-1.75) 11(-4.025,-2.25) 12(-4.025,-2.75) 25(4.025,-2.75) 26(4.025,-2.25) 27(4.025,-1.75) 28(4.025,-1.25) 29(4.025,-0.75) 30(4.025,-0.25) 31(4.025,0.25) 32(4.025,0.75) 33(4.025,1.25) 34(4.025,1.75) 35(4.025,2.25) 36(4.025,2.75)
  oval 0.25x1.55 smd: 13(-2.75,-4.025) 14(-2.25,-4.025) 15(-1.75,-4.025) 16(-1.25,-4.025) 17(-0.75,-4.025) 18(-0.25,-4.025) 19(0.25,-4.025) 20(0.75,-4.025) 21(1.25,-4.025) 22(1.75,-4.025) 23(2.25,-4.025) 24(2.75,-4.025) 37(2.75,4.025) 38(2.25,4.025) 39(1.75,4.025) 40(1.25,4.025) 41(0.75,4.025) 42(0.25,4.025) 43(-0.25,4.025) 44(-0.75,4.025) 45(-1.25,4.025) 46(-1.75,4.025) 47(-2.25,4.025) 48(-2.75,4.025)
  silkscreen extent -4.15,-2.85 2.85,3.55, body extent -3.5,-3.5 3.5,3.5, height 1.6
TFPUSH [mm]
  rect 0.7x1.6 smd: 1(2.25,7.75) 2(1.15,7.75) 3(0.05,7.75) 4(-1.05,7.75) 5(-2.15,7.75) 6(-3.25,7.75) 7(-4.35,7.75) 8(-5.45,7.75) CD1(-6.55,7.75)
  rect 1.6x1.5 smd: G1(6.85,6.75)
  rect 1.2x1.5 smd: G2(-7.75,6.75)
  rect 1.2x2.2 smd: G3(-7.75,-2.85) G4(7.75,-2.85)
  round 0.5 hole 1 unplated: MH1(3.05,-3.25) MH2(-4.95,-3.25)
  silkscreen extent -7.37,-6.85 7.37,9.45, body extent -8.23,-7.25 8.23,8.48, height 2.1
USB1125GFB [mm]
  rect 1.431x1.431 hole 0.92: 1(0,0)
  round 1.431 hole 0.92: 2(-2.5,0) 3(-4.5,0) 4(-7,0)
  round 2.565 hole 1.71: 5(-9.9,-1.2) 6(2.9,-1.2)
  silkscreen extent -10.05,-9.5 3.05,1.3, body extent -10.05,-9.64 3.05,0.36, height 6.34
"YAGEO RES 0603_1608" [mm] "Chip Resistor, 2-Leads, Body 1.60x0.80mm"
  rect 0.9x0.8 smd: 1(-0.85,0) 2(0.85,0)
  silkscreen extent -1.5,-0.6 1.5,0.6, body extent -0.8,-0.4 0.8,0.4, height 0.45
"Yajingxin TX32258M4DBDD2T-Footprint-1" [mm]
  rect 1.4x1.2 smd: 1(-1.1,-0.9) 2(1.1,-0.9) 3(1.1,0.9) 4(-1.1,0.9)
  silkscreen extent -2.3,-2 -2.1,-1.8, body extent -1.9,-1.6 1.9,1.6, height 0.3

## Part data
C1 C2 C3 C9 C16 C18 C19 C20 C26 C27 C28 C29 C33 C34 C35 C48 C49 C51 C53 C55 C58 C59 C61: library part GRM21BR61E106KA73K, "CAP CER 10UF 25V X5R 0805", Device Package="0805 (2012 Metric)", Manufacturer="Murata Electronics", Operating Temperature="-55°C ~ 85°C", Supplier Part Number 1=490-16824-1-ND, Temperature Coefficient=X5R, Tolerance=±10%, Voltage - Rated=25V, Applications="General Purpose", Capacitance="10 µF", componentlink1description=Datasheet, componentlink1url=https://search.murata.co.jp/Ceramy/image/img/A01X/G101/ENG/GRM21BR61E106KA73-01.pdf, componentlink2description="DigiKey Link", componentlink2url=https://www.digikey.com/en/products/detail/murata-electronics/GRM21BR61E106KA73K/4905532, lastupdated="8/27/2024 9:29:55 AM", Lifecycle Status=Active, Minimum Order=1, Mounting Type="Surface Mount, MLCC", Package / Case="0805 (2012 Metric)", packaging=TapeAndReel, Part Number=GRM21BR61E106KA73K, Part Status=Active, partid=15140, price=0.02, series=GRM, Size / Dimension="0.079\" L x 0.049\" W (2.00mm x 1.25mm)", Supplier 1=DigiKey, Thickness (Max)="0.055\" (1.40mm)"
C4 C5 C6 C7 C8 C10 C12 C14 C15 C17 C21 C24 C25 C32 C36 C37 C38 C39 C40 C41 C42 C43 C44 C45 C46 C47 C50 C52 C54 C56 C57 C60 C62: library part GCJ188R71H104KA12D, "CAP CER 0.1UF 50V X7R 0603", Device Package="0603 (1608 Metric)", Manufacturer="Murata Electronics", Operating Temperature="-55°C ~ 125°C", Ratings=AEC-Q200, Supplier Part Number 1=490-5798-1-ND, Temperature Coefficient=X7R, Tolerance=±10%, Voltage - Rated=50V, Applications="Automotive, Boardflex Sensitive", Capacitance="0.1 µF", componentlink1description=Datasheet, componentlink1url=https://www.murata.com/~/media/webrenewal/support/library/catalog/products/capacitor/mlcc/c03e.ashx?la=en-us, componentlink2description="DigiKey Link", componentlink2url=https://www.digikey.com/en/products/detail/murata-electronics/GCJ188R71H104KA12D/2783803, Features="Soft Termination", lastupdated="2/9/2024 8:10:08 PM", Lifecycle Status=Active, Minimum Order=1, Mounting Type="Surface Mount, MLCC", Package / Case="0603 (1608 Metric)", packaging=TapeAndReel, Part Number=GCJ188R71H104KA12D, Part Status=Active, partid=16867, price=0.01, series=GCJ, Size / Dimension="0.063\" L x 0.031\" W (1.60mm x 0.80mm)", Supplier 1=DigiKey, Thickness (Max)="0.035\" (0.90mm)"
C11 C13 C22 C23 C30 C31: library part GCM1885C2A100FA16D, "CAP CER 10PF 100V C0G/NP0 0603", Device Package="0603 (1608 Metric)", Manufacturer="Murata Electronics", Operating Temperature="-55°C ~ 125°C", Ratings=AEC-Q200, Supplier Part Number 1=490-GCM1885C2A100FA16DCT-ND, Temperature Coefficient="C0G, NP0", Tolerance=±1%, Voltage - Rated=100V, Applications=Automotive, Capacitance="10 pF", componentlink1description=Datasheet, componentlink1url=https://search.murata.co.jp/Ceramy/image/img/A01X/G101/ENG/GCM1885C2A100FA16-01.pdf, componentlink2description="DigiKey Link", componentlink2url=https://www.digikey.com/en/products/detail/murata-electronics/GCM1885C2A100FA16D/11618736, lastupdated="7/20/2024 12:24:59 AM", Lifecycle Status=Active, Minimum Order=1, Mounting Type="Surface Mount, MLCC", Package / Case="0603 (1608 Metric)", packaging=TapeAndReel, Part Number=GCM1885C2A100FA16D, Part Status=Active, partid=36047, price=0.02, series=GCM, Size / Dimension="0.063\" L x 0.031\" W (1.60mm x 0.80mm)", Supplier 1=DigiKey, Thickness (Max)="0.035\" (0.90mm)"
D1 D2 D3 D4 D5 D6 D7 D8 D9 D10: library part B1931URO-20D000114U1930, "LED RED DIFFUSED 0603 SMD", Color=Red, Current - Test=20mA, Device Package="0603 (1608 Metric)", Manufacturer="Harvatek Corporation", Millicandela Rating=45mcd, Supplier Device Package=0603, Supplier Part Number 1=3147-B1931URO-20D000114U1930CT-ND, Voltage - Forward (Vf) (Typ)=2V, componentlink2description="DigiKey Link", componentlink2url=https://www.digikey.com/en/products/detail/harvatek-corporation/B1931URO-20D000114U1930/15910603, lastupdated="6/3/2024 7:59:45 PM", Lens Size="1.00mm x 0.80mm", Lens Style="Rectangle with Flat Top", Lens Transparency=Diffused, Lifecycle Status=Active, Minimum Order=1, Mounting Type="Surface Mount", Package / Case="0603 (1608 Metric)", packaging=TapeAndReel, Part Number=B1931URO-20D000114U1930, Part Status=Active, partid=1009, price=0.04, series=-, Size / Dimension="1.60mm L x 0.80mm W", Supplier 1=DigiKey, Viewing Angle="125°, 135°", Wavelength - Peak=639nm
H1: library part CMP-002-00084-1
IC1: "Integrated Circuit", Manufacturer_Name=Advanced, Datasheet Link=https://datasheet.datasheetarchive.com/originals/distributors/Datasheets-28/DSA-550594.pdf, Height=1.8mm, Manufacturer_Part_Number=AMS1117-3.3
IC2 IC3: "Integrated Circuit", Manufacturer_Name="Terminus Technology"
  IC2: Datasheet Link=https://datasheet.lcsc.com/lcsc/2306141021_Terminus-Tech-FE1-1S-BQFN24B_C6776948.pdf, Height=0.8mm, Manufacturer_Part_Number=FE1.1S-BQFN24B
  IC3: Height=1.6mm, Manufacturer_Part_Number=FE2.1_QFP
IC4: "Integrated Circuit", Manufacturer_Name=Genesys, Datasheet Link=https://www.lcsc.com/datasheet/C284879.pdf, Height=1.75mm, Manufacturer_Part_Number=GL823K-HCY04
IC5 IC6 IC7 IC8 IC9 IC10 IC11 IC12: "Integrated Circuit", Manufacturer_Name="Texas Instruments", Mouser Part Number=595-TPD4E001RDBVR, Arrow Part Number=TPD4E001RDBVR, Arrow Price/Stock=https://www.arrow.com/en/products/tpd4e001rdbvr/texas-instruments?utm_currency=USD&region=nac, Datasheet Link=http://www.ti.com/lit/gpn/TPD4E001, Height=1.45mm, Manufacturer_Part_Number=TPD4E001RDBVR, Mouser Price/Stock=https://www.mouser.co.uk/ProductDetail/Texas-Instruments/TPD4E001RDBVR?qs=P1JMDcb91o7xMbcYcXI1uw%3D%3D
J1: "Connector", Manufacturer_Name="Shou Han", Manufacturer_Part_Number="TF PUSH", Datasheet Link=https://datasheet.lcsc.com/szlcsc/1912111437_SHOU-HAN-TF-PUSH_C393941.pdf, Height=2mm
J2 J3 J4 J5 J6: library part CMP-002-00071-1, "Conn USB 2.0 Type C RCP 24 POS 0.3mm/0.5mm Solder RA SMD 24 Terminal 1 Port T/R"
J7 J8 J9: "Connector", Manufacturer_Name="GCT (GLOBAL CONNECTOR TECHNOLOGY)", Mouser Part Number=640-USB1125-GF-B, Datasheet Link=https://gct.co/Files/Drawings/USB1125.pdf?v=4becdda1-cc62-4082-a121-52fbd8b9794d, Height=6.63mm, Manufacturer_Part_Number=USB1125-GF-B, Mouser Price/Stock=https://www.mouser.co.uk/ProductDetail/GCT/USB1125-GF-B?qs=KUoIvG%2F9IlbMrLtAEIp0gA%3D%3D
P1 P3: library part CMP-002-00079-1, "Pin Header, Board-to-Board, 2.54 mm, 2 Rows, 6 Contacts, Through Hole, MTLW Series", Max Operating Temperature=125°C, Min Operating Temperature=-55°C
P2: library part CMP-002-00021-2, "Male Header, Pitch 2.54 mm, 1 x 5 Position, Height 16.24 mm, Tail Length 3.05 mm, -65 to 125 degC, RoHS, Tape and Reel", Case/Package=77311-5, Manufacturer="FCI Electronics", Package Description="Male Header, Pitch 2.54 mm, 1 x 5 Position, Height 16.24 mm, Tail Length 3.05 mm", Connector Type=Header, Datasheet URL=http://portal.fciconnect.com/Comergent//fci/drawing/77311.pdf, Datasheet Version="Rev. CK, 07/2016", Gender=Male, Manufacturer URL=http://portal.fciconnect.com/, Mounting Technology=TH, Package Reference=77311-5, RoHS Compliant=Unknown
R1 R10: library part RTAN0805BKE2K70, "RES 2.7K OHM 0.1% 1/5W 0805", Device Package="0805 (2012 Metric)", Manufacturer="Stackpole Electronics Inc", Operating Temperature="-55°C ~ 155°C", Power (Watts)="0.2W, 1/5W", Ratings=AEC-Q200, Supplier Device Package=0805, Supplier Part Number 1=RTAN0805BKE2K70CT-ND, Temperature Coefficient=±25ppm/°C, Tolerance=±0.1%, componentlink1description=Datasheet, componentlink1url=https://www.seielect.com/catalog/sei-rtan.pdf, componentlink2description="DigiKey Link", componentlink2url=http://digikey.com/product-detail/en/stackpole-electronics-inc/RTAN0805BKE2K70/RTAN0805BKE2K70CT-ND/6602266, Composition="Thin Film", Features="Anti-Sulfur, Automotive AEC-Q200, Moisture Resistant", Height - Seated (Max)="0.026\" (0.65mm)", lastupdated="2/8/2024 9:02:20 PM", Lifecycle Status=Active, Minimum Order=1, Number of Terminations=2, Package / Case="0805 (2012 Metric)", packaging=TapeAndReel, Part Number=RTAN0805BKE2K70, Part Status=Active, partid=31922, price=0.17, Resistance="2.7 kOhms", series=RTAN, Size / Dimension="0.079\" L x 0.049\" W (2.00mm x 1.25mm)", Supplier 1=DigiKey
R2 R9 R11 R13 R14 R15 R16 R17 R18 R19: library part RT0603FRE071KL, "RES SMD 1K OHM 1% 1/10W 0603", Device Package="0603 (1608 Metric)", Manufacturer=Yageo, Operating Temperature="-55°C ~ 155°C", Power (Watts)="0.1W, 1/10W", Supplier Device Package=0603, Supplier Part Number 1=YAG2323CT-ND, Temperature Coefficient=±50ppm/°C, Tolerance=±1%, componentlink1description=Datasheet, componentlink1url=https://www.yageo.com/upload/media/product/productsearch/datasheet/rchip/PYu-RT_1-to-0.01_RoHS_L_11.pdf, componentlink2description="DigiKey Link", componentlink2url=https://www.digikey.com/en/products/detail/yageo/RT0603FRE071KL/1075188, Composition="Thin Film", Height - Seated (Max)="0.022\" (0.55mm)", lastupdated="7/25/2024 9:19:32 AM", Lifecycle Status=Active, Minimum Order=1, Number of Terminations=2, Package / Case="0603 (1608 Metric)", packaging=TapeAndReel, Part Number=RT0603FRE071KL, Part Status=Active, partid=5672, price=0.01, Resistance="1 kOhms", series=RT, Size / Dimension="0.063\" L x 0.031\" W (1.60mm x 0.80mm)", Supplier 1=DigiKey
R3: library part RT0603FRE071KL, "RES SMD 1K OHM 1% 1/10W 0603", Device Package="0603 (1608 Metric)", Manufacturer=Yageo, Operating Temperature="-55°C ~ 155°C", Power (Watts)="0.1W, 1/10W", Resistance="1 kOhms", Supplier Device Package=0603, Supplier Part Number 1=YAG2323CT-ND, Temperature Coefficient=±50ppm/°C, Tolerance=±1%, componentlink1description=Datasheet, componentlink1url=https://www.yageo.com/upload/media/product/productsearch/datasheet/rchip/PYu-RT_1-to-0.01_RoHS_L_11.pdf, componentlink2description="DigiKey Link", componentlink2url=https://www.digikey.com/en/products/detail/yageo/RT0603FRE071KL/1075188, Composition="Thin Film", Height - Seated (Max)="0.022\" (0.55mm)", lastupdated="7/25/2024 9:19:32 AM", Lifecycle Status=Active, Minimum Order=1, Number of Terminations=2, Package / Case="0603 (1608 Metric)", packaging=TapeAndReel, Part Number=RT0603FRE071KL, Part Status=Active, partid=5672, price=0.01, series=RT, Size / Dimension="0.063\" L x 0.031\" W (1.60mm x 0.80mm)", Supplier 1=DigiKey
R4 R5 R6: library part CRCW060310K0JNEAC, "RES 10K OHM 5% 1/10W 0603", Device Package="0603 (1608 Metric)", Manufacturer="Vishay Dale", Operating Temperature="-55°C ~ 155°C", Power (Watts)="0.1W, 1/10W", Resistance="10 kOhms", Supplier Device Package=0603, Supplier Part Number 1=541-3957-1-ND, Temperature Coefficient=±200ppm/°C, Tolerance=±5%, componentlink1description=Datasheet, componentlink1url=http://www.vishay.com/docs/28773/crcwce3.pdf, componentlink2description="DigiKey Link", componentlink2url=https://www.digikey.com/en/products/detail/vishay-dale/CRCW060310K0JNEAC/7928379, Composition="Thick Film", Height - Seated (Max)="0.022\" (0.55mm)", lastupdated="2/9/2024 8:42:33 PM", Lifecycle Status=Active, Minimum Order=1, Number of Terminations=2, Package / Case="0603 (1608 Metric)", packaging=CutTape, Part Number=CRCW060310K0JNEAC, Part Status=Active, partid=21155, price=0.01, series=CRCW-C, Supplier 1=DigiKey
R7 R8 R12 R26 R38: library part CRCW060310K0JNEAC, "RES 10K OHM 5% 1/10W 0603", Device Package="0603 (1608 Metric)", Manufacturer="Vishay Dale", Operating Temperature="-55°C ~ 155°C", Power (Watts)="0.1W, 1/10W", Supplier Device Package=0603, Supplier Part Number 1=541-3957-1-ND, Temperature Coefficient=±200ppm/°C, Tolerance=±5%, componentlink1description=Datasheet, componentlink1url=http://www.vishay.com/docs/28773/crcwce3.pdf, componentlink2description="DigiKey Link", componentlink2url=https://www.digikey.com/en/products/detail/vishay-dale/CRCW060310K0JNEAC/7928379, Composition="Thick Film", Height - Seated (Max)="0.022\" (0.55mm)", lastupdated="2/9/2024 8:42:33 PM", Lifecycle Status=Active, Minimum Order=1, Number of Terminations=2, Package / Case="0603 (1608 Metric)", packaging=CutTape, Part Number=CRCW060310K0JNEAC, Part Status=Active, partid=21155, price=0.01, Resistance="10 kOhms", series=CRCW-C, Supplier 1=DigiKey
R20 R21 R22 R24 R27: library part RC0603FR-0751KL, "RES 51K OHM 1% 1/10W 0603", Device Package="0603 (1608 Metric)", Manufacturer=Yageo, Operating Temperature="-55°C ~ 155°C", Power (Watts)="0.1W, 1/10W", Resistance="51 kOhms", Supplier Device Package=0603, Supplier Part Number 1=311-51.0KHRCT-ND, Temperature Coefficient=±100ppm/°C, Tolerance=±1%, componentlink1description=Datasheet, componentlink1url=https://www.yageo.com/upload/media/product/productsearch/datasheet/rchip/PYu-RC_Group_51_RoHS_L_10.pdf, componentlink2description="DigiKey Link", componentlink2url=https://www.digikey.com/en/products/detail/yageo/RC0603FR-0751KL/727282, Composition="Thick Film", Features="Moisture Resistant", Height - Seated (Max)="0.022\" (0.55mm)", lastupdated="7/25/2024 9:19:21 AM", Lifecycle Status=Active, Minimum Order=1, Number of Terminations=2, Package / Case="0603 (1608 Metric)", packaging=CutTape, Part Number=RC0603FR-0751KL, Part Status=Active, partid=18942, price=0.01, series=RC_L, Size / Dimension="0.063\" L x 0.031\" W (1.60mm x 0.80mm)", Supplier 1=DigiKey
R23 R25: library part RMCF0603FT22R0, "RES 22 OHM 1% 1/10W 0603", Device Package="0603 (1608 Metric)", Manufacturer="Stackpole Electronics Inc", Operating Temperature="-55°C ~ 155°C", Power (Watts)="0.1W, 1/10W", Ratings=AEC-Q200, Resistance="22 Ohms", Supplier Device Package=0603, Supplier Part Number 1=RMCF0603FT22R0CT-ND, Temperature Coefficient=±100ppm/°C, Tolerance=±1%, componentlink1description=Datasheet, componentlink1url=https://www.seielect.com/catalog/sei-packaging.pdf, componentlink2description="DigiKey Link", componentlink2url=https://www.digikey.com/en/products/detail/stackpole-electronics-inc/RMCF0603FT22R0/1760726, Composition="Thick Film", Features="Automotive AEC-Q200", Height - Seated (Max)="0.022\" (0.55mm)", lastupdated="2/9/2024 8:43:14 PM", Lifecycle Status=Active, Minimum Order=1, Number of Terminations=2, Package / Case="0603 (1608 Metric)", packaging=CutTape, Part Number=RMCF0603FT22R0, Part Status=Active, partid=10611, price=0.01, series=RMCF, Size / Dimension="0.061\" L x 0.031\" W (1.55mm x 0.80mm)", Supplier 1=DigiKey
R28 R33: library part RK73B1JTTDD512J, "RESISTOR", Device Package="0603 (1608 Metric)", Manufacturer="KOA Speer Electronics, Inc.", Operating Temperature="-55°C ~ 155°C", Power (Watts)="0.1W, 1/10W", Ratings=AEC-Q200, Supplier Device Package=0603, Supplier Part Number 1=2019-RK73B1JTTDD512JCT-ND, Temperature Coefficient=±200ppm/°C, Tolerance=±5%, componentlink1description=Datasheet, componentlink1url=https://www.koaspeer.com/pdfs/RK73B.pdf, componentlink2description="DigiKey Link", componentlink2url=https://www.digikey.com/en/products/detail/koa-speer-electronics-inc/RK73B1JTTDD512J/21680160, Composition="Thick Film", Features="Automotive AEC-Q200", Height - Seated (Max)="0.022\" (0.55mm)", lastupdated="7/25/2024 9:42:51 AM", Lifecycle Status=Active, Minimum Order=1, Number of Terminations=2, Package / Case="0603 (1608 Metric)", packaging=CutTape, Part Number=RK73B1JTTDD512J, partid=89828, price=0.01, Resistance="5.1 kOhms", series=RK73B, Size / Dimension="0.063\" L x 0.031\" W (1.60mm x 0.80mm)", Supplier 1=DigiKey
R29 R30 R31 R32 R34 R35: library part RC0603JR-0756KL, "RES 56K OHM 5% 1/10W 0603", Device Package="0603 (1608 Metric)", Manufacturer=Yageo, Operating Temperature="-55°C ~ 155°C", Power (Watts)="0.1W, 1/10W", Supplier Device Package=0603, Supplier Part Number 1=311-56KGRCT-ND, Temperature Coefficient=±100ppm/°C, Tolerance=±5%, componentlink1description=Datasheet, componentlink1url=https://www.yageo.com/upload/media/product/productsearch/datasheet/rchip/PYu-RC_Group_51_RoHS_L_10.pdf, componentlink2description="DigiKey Link", componentlink2url=https://www.digikey.com/en/products/detail/yageo/RC0603JR-0756KL/726808, Composition="Thick Film", Features="Moisture Resistant", Height - Seated (Max)="0.022\" (0.55mm)", lastupdated="7/25/2024 9:19:24 AM", Lifecycle Status=Active, Minimum Order=1, Number of Terminations=2, Package / Case="0603 (1608 Metric)", packaging=CutTape, Part Number=RC0603JR-0756KL, Part Status=Active, partid=17226, price=0.01, Resistance="56 kOhms", series=RC_L, Size / Dimension="0.063\" L x 0.031\" W (1.60mm x 0.80mm)", Supplier 1=DigiKey
R36 R37: library part RK73B1JTTDD512J, "RESISTOR", Device Package="0603 (1608 Metric)", Manufacturer="KOA Speer Electronics, Inc.", Operating Temperature="-55°C ~ 155°C", Power (Watts)="0.1W, 1/10W", Ratings=AEC-Q200, Resistance="5.1 kOhms", Supplier Device Package=0603, Supplier Part Number 1=2019-RK73B1JTTDD512JCT-ND, Temperature Coefficient=±200ppm/°C, Tolerance=±5%, componentlink1description=Datasheet, componentlink1url=https://www.koaspeer.com/pdfs/RK73B.pdf, componentlink2description="DigiKey Link", componentlink2url=https://www.digikey.com/en/products/detail/koa-speer-electronics-inc/RK73B1JTTDD512J/21680160, Composition="Thick Film", Features="Automotive AEC-Q200", Height - Seated (Max)="0.022\" (0.55mm)", lastupdated="7/25/2024 9:42:51 AM", Lifecycle Status=Active, Minimum Order=1, Number of Terminations=2, Package / Case="0603 (1608 Metric)", packaging=CutTape, Part Number=RK73B1JTTDD512J, partid=89828, price=0.01, series=RK73B, Size / Dimension="0.063\" L x 0.031\" W (1.60mm x 0.80mm)", Supplier 1=DigiKey
R39: library part RNCP0603FTD1K50, "RES 1.5K OHM 1% 1/8W 0603", Device Package="0603 (1608 Metric)", Manufacturer="Stackpole Electronics Inc", Operating Temperature="-55°C ~ 155°C", Power (Watts)="0.125W, 1/8W", Supplier Device Package=0603, Supplier Part Number 1=RNCP0603FTD1K50CT-ND, Temperature Coefficient=±100ppm/°C, Tolerance=±1%, componentlink1description=Datasheet, componentlink1url=https://www.seielect.com/catalog/sei-rncp.pdf, componentlink2description="DigiKey Link", componentlink2url=https://www.digikey.com/en/products/detail/stackpole-electronics-inc/RNCP0603FTD1K50/2240110, Composition="Thin Film", Features=Anti-Sulfur, Height - Seated (Max)="0.022\" (0.55mm)", lastupdated="2/9/2024 8:43:33 PM", Lifecycle Status=Active, Minimum Order=1, Number of Terminations=2, Package / Case="0603 (1608 Metric)", packaging=TapeAndReel, Part Number=RNCP0603FTD1K50, Part Status=Active, partid=5700, price=0.01, Resistance="1.5 kOhms", series=RNCP, Size / Dimension="0.061\" L x 0.031\" W (1.55mm x 0.80mm)", Supplier 1=DigiKey
S1 S2: "Switch", Manufacturer_Name="C & K COMPONENTS", Mouser Part Number=611-SK12D07VG6NS, Datasheet Link=https://www.ckswitches.com/media/1432/sk.pdf, Height=4.7mm, Manufacturer_Part_Number=SK12D07VG6NS, Mouser Price/Stock=https://www.mouser.co.uk/ProductDetail/CK/SK12D07VG6NS?qs=Gufeu08L%2Fl2onKkgb1iMzw%3D%3D
ST1 ST2 ST3 ST4: library part CMP-00028-00004-2, "M2 PTH (2.5mm), 5mm pad", Pins=1
U1: library part CMP-020-00023-1, "RISC Microcontroller, 32-Bit, FLASH, STM32 CPU, 72MHz, CMOS, PQFP48", Case/Package=LFQFP, Clock Frequency=16MHz, Max Operating Temperature=105°C, Max Supply Voltage=3.6V, Min Operating Temperature=-40°C, Min Supply Voltage=2V, Nominal Supply Voltage=3.3V, Interface=I2C,SPI,USB,CAN,USART, Pins=48, RoHS Compliant=Yes
U2 U3: library part CMP-013-000000-1, "USB to High-Speed Serial Chip CH343", Package=Package, Check_prices=https://www.snapeda.com/parts/CH343P/WCH/view-part/?ref=eda, Component Type=Standard, Design Item ID=CH343P, MF=WCH, MP=CH343P, Pin Count=17, SnapEDA_Link=https://www.snapeda.com/parts/CH343P/WCH/view-part/?ref=snap, Source=CH343P.SchLib
U4 U5 U6 U7 U8 U9: library part CMP-019-00060-1, "0.5A loading, 2.7-5.5V, 70mΩ USB power switch, active-high 5-SOT-23 -40 to 125", Case/Package=SOT-23, Max Operating Temperature=85°C, Max Power Dissipation=285mW, Max Supply Voltage=5.5V, Min Operating Temperature=-40°C, Min Supply Voltage=2.7V, Output Current=500mA, Output Voltage=6V, Mounting Technology="Surface Mount", Pins=5
Y1 Y2 Y3: library part CMP-003-00030-8, "8 MHz crystal, CL: 10pF, +/-10ppm"

## Via types
v1: diameter 0.5/0.5/0.5/0.5 (per signal layer), hole 0.3, Top Copper to Bottom Copper, tented both sides, 720 vias
v2: diameter 0.5, hole 0.3, Top Copper to Bottom Copper, tented both sides, 197 vias
v3: diameter 0.5, hole 0.3, Top Copper to Bottom Copper, 3 vias
v4: diameter 0.6/0.6/0.6/0.6 (per signal layer), hole 0.3, Top Copper to Bottom Copper, tented both sides, 1 vias

## Nets (pads, with @x,y where several pads share a name; then routed paths per layer and width w, separated by ;. In a path a pad name is that pad's centre, name@x,y a point inside that pad or via, vN(x,y) a via of type N, cw(c..) or ccw(c..) an arc to the next point about the centre after c; other vN are vias at no path point)
+3V3: C2.2 C3.2 C4.2 C5.2 C6.2 C7.2 C8.2 C20.2 C29.2 C32.2 C33.2 D3.1 H1.1 IC1.2 IC4.9 IC4.13 P1.2 P3.2 R8.2 R12.2 R20.2 R21.2 R22.2 R24.2 R27.2 R39.2 S1.3 S2.3 U1.1 U1.9 U1.24 U1.36 U1.48 | length 143
  Top Copper w0.2: H1.1@68.024,85 73.547,85 75,86.453 R8.2@75,87.7 ; R8.2@75.348,87.748 75.4,87.8 88.154,87.8 v1(88.5,87.454) ; 113.525,82.5 114.031,83.006 114.006,83.006 S2.3@114.8,83.8 ; P1.2@121.5,85.46 121.525,85.435 123.06,83.9 125.338,83.9 126.858,82.381 132.856,82.381 S1.3@134.25,83.775
  Top Copper w0.25: v1(86.284,93.728) 86.287,93.725 C4.2@87.7,93.725 ; v1(86.468,88.734) 86.516,88.782 86.928,88.782 87.368,89.222 87.368,89.7 87.693,90.025 C5.2@87.7,90.025 ; C4.2@87.9,93.625 87.975,93.55 C3.2@89.8,93.55 ; v1(88.5,87.454) 89.041,87.996 89.041,90 C6.2@89.366,90.325 ; C6.2@89.366,90.025 C6.2@89.4,90.025 C6.2@89.567,90.025 ; D3.1@93.8,84.602 93.8,85.291 94.7,86.191 C8.2@94.7,87.2 95.025,87.525 95.973,87.525 96.126,87.679 v1(96.194,87.679) ; C7.2@94.975,95.7 95.075,95.8 v1(96.2,95.8)
  Top Copper w0.3: R22.2@75.35,96.2 R24.2@75.35,97.8 ; R27.2@75.35,99.4 R24.2@75.35,97.8 ; R20.2@75.45,105.2 R21.2@75.45,106.6 ; R21.2@75.45,106.8 R21.2@75.45,106.6 ; v1(75.461,108.167) 75.461,106.611 R21.2@75.45,106.6 ; v1(76.5,97.8) R24.2@75.35,97.8 ; IC4.9@83.85,100.16 83.917,100.228 IC4.9@84,100.228 ; R12.2@94.55,92.8 94.55,93.61 96.2,95.26 v1(96.2,95.8) ; R39.2@103.3,93.5 v1(104.5,93.5)
  Top Copper w0.4: IC4.13@84,102.768 84.033,102.735 84.876,102.735 85.575,102.036 85.989,102.036 C32.2@86.2,101.825 87.475,101.825 v1(87.5,101.8) ; C29.2@102.45,82.8 102.45,82.555 102.6,82.405 113.525,82.405 121.4,82.405 121.55,82.555 C20.2@121.55,82.8
  Top Copper w0.5: IC4.9@83.85,100.16 C33.2@83.85,98.6 83.85,97.15 v1(83.9,97.1) ; P3.2@102.475,85.435 P3.2@102.5,85.46
  Top Copper w0.6: C29.2@102.475,82.825 P3.2@102.475,85.435 ; C20.2@121.525,82.825 P1.2@121.525,85.435
  Signal Layer 2 w0.6: v1(83.9,97.1) 85.454,95.546 93,95.546
  Bottom Copper w0.25: v1(86.284,93.728) 86.332,93.68 86.332,93.348 86.929,92.75 U1.9@88.1,92.75 ; v1(86.468,88.734) 86.473,88.729 87.144,88.729 87.155,88.74 88.09,88.74 U1.1@88.1,88.75 ; v1(88.5,87.454) 88.548,87.407 88.708,87.407 88.724,87.39 89.44,87.39 U1.48@89.45,87.4 ; U1.24@94.95,95.6 94.95,95.777 94.973,95.8 v1(96.2,95.8) ; v1(96.194,87.679) 96.194,88.75 U1.36@96.225,88.75
  Bottom Copper w0.3: v1(103.5,96) 104.5,95 v1(104.5,93.5)
  Bottom Copper w0.4: v1(83.9,97.1) 87.5,100.7 v1(87.5,101.8)
  Bottom Copper w0.5: v1(75.461,108.167) 76.5,107.128 v1(76.5,97.8) 77.196,97.104 81.438,97.104 81.688,97.354 82.312,97.354 82.562,97.104 v1@83.896,97.104
  other v1: 92.7,90 93.5,90 102.746,96
+5V: C1.2 C14.2 C16.2 C17.1 C18.2 C19.2 C24.2 C26.2 C27.2 C28.2 C45.2 C47.2 C48.2 IC1.3 IC2.19 IC3.8 IC4.10 IC5.1 J2.A4-B9 J2.B4-A9 P1.4 P3.4 R4.1 R5.1 R6.1 S1.1 S2.1 U2.3 U2.9 U3.3 U3.9 U4.5 U5.5 U6.5 U7.5 U8.5 U9.5 | length 104.6
  Top Copper w0.2: P3.4@102.5,88 103.8,86.7 109.2,86.7 110.8,85.1 S2.1@110.8,83.8
  Top Copper w0.25: R5.1@110.1,115.65 v1(110.1,116.6) 111.65,116.6 R4.1@111.7,116.65 R6.1@113.3,116.65 ; U3.3@114.85,91 116.325,91 C24.2@116.45,91.125 ; U2.9@131.64,91.765 U2.9@131.655,91.75
  Top Copper w0.3: IC2.19@99.85,102.8 100.574,102.8 100.658,102.884 v1(100.712,102.884) ; C27.2@110.2,91.65 110.35,91.5 U3.9@111.96,91.5 ; C18.2@129.885,91.765 U2.9@131.64,91.765 ; U2.3@134.545,91.25 C14.2@135.975,91.25
  Top Copper w0.4: IC4.10@84,100.862 85.462,100.862 85.95,100.374 85.95,100.25 86.15,100.05 C45.2@86.2,100.05 87.615,100.05 v1(88.021,99.644)
  Top Copper w0.5: C28.2@99.9,86.95 101.45,86.95 P3.4@102.5,88 ; C27.2@110.2,91.65 v1(110.2,92.9) ; C24.2@116.45,91.125 116.625,91.3 v1(117.9,91.3) ; C18.2@129.8,91.85 v1(129.8,92.9) ; C14.2@136.2,91.475 136.25,91.475 137.6,92.825 137.6,95.2 138.65,96.25 IC5.1@138.65,96.75
  Signal Layer 2 w0.5: v1(110.2,92.9) 109,91.7 109,86.9 110.8,85.1 S2.1@110.8,83.8 ; v1(129.8,92.9) 129.987,92.713 129.987,84.255 130.25,83.991 S1.1@130.25,83.775
  Bottom Copper w0.2: P1.4@121.5,88 122.713,86.787 122.713,84.644 123.056,84.302 125.637,84.302 126.697,85.361 129.063,85.361 130.04,84.385 130.04,83.985 S1.1@130.25,83.775
  Bottom Copper w0.3: C16.2@100.55,106.2 100.55,104.375 C17.1@100.725,104.2 100.712,104.187 v1(100.712,102.884) ; v1(113.5,104.8) 114.048,105.348 C26.2@115.114,105.348
  Bottom Copper w0.5: v1(110.2,92.9) 110.2,94.6 ; 118.002,94.5 117.9,94.398 v1(117.9,91.3) 117.9,88.818 118.368,88.35 C19.2@119.2,88.35 120.874,88.35 121.224,88 P1.4@121.5,88 ; v1(129.8,92.9) 129.8,94.5
  Bottom Copper w0.6: v1(88.021,99.644) 90.444,99.644 92.4,101.6 100.8,101.6
  other v1: 142.4,92.9 143.3,92.9 142.4,93.9 143.3,93.9 142.4,94.9 143.3,94.9 142.4,95.9 143.3,95.9 112.7,104.8 73.5,115.6 90.2,115.6 107.25,116 73.5,116.4 90.2,116.4 147,116.6 122.2,116.9 123,116.9 107.25,117 136.25,117 137.25,117 147,117.4
+5V_PORT2: C61.2 C62.2 IC12.1 J9.4 U9.1
+5V_PORT3: C55.2 C56.2 IC8.1 J7.4 U7.1
+5V_PORT4: C59.2 C60.2 IC9.1 J8.4 U8.1
+5V_PORT5: C53.2 C54.2 IC10.1 J5.A4-B9 J5.B4-A9 R34.2 R35.2 U6.1 | length 16.7
  Top Copper w0.166: 145.46,118.406 145.569,118.296 150.446,118.296 151.1,118.95 151.1,126 150.5,126.6 R35.2@149.25,126.6 R34.2@149.25,128.15
  other v1: 140.9,121.7 144.6,121.8 141.4,122.4 143.9,122.4
+5V_PORT6: C51.2 C52.2 IC7.1 J4.A4-B9 J4.B4-A9 R31.2 R32.2 U5.1 | length 15.1
  Top Copper w0.166: 131.137,117.335 135.452,117.335 135.935,117.818 135.935,125.265 135.25,125.95 R32.2@135.25,126 R31.2@135.25,127.65
  other v1: 127,121.5 131,121.6 127.7,122.2 130.3,122.2
+5V_PORT7: C49.2 C50.2 IC6.1 J3.A4-B9 J3.B4-A9 R29.2 R30.2 U4.1 | length 14.2
  Top Copper w0.166: 118.231,117.476 121.612,117.476 122.258,118.123 122.258,125.292 121.5,126.05 R30.2@121.5,126.1 R29.2@121.5,127.75
  other v1: 113.1,121.7 117.2,121.7 113.9,122.3 116.4,122.3
+5V_UPSTREAM: C57.2 C58.2 IC2.17 IC3.41 IC11.1 J6.A4-B9 J6.B4-A9 | length 52.7
  Top Copper w0.3: IC2.17@100.6,101.55 101.805,101.55 v1(102.249,101.994) ; v1(120.247,112.092) 120.247,112.011 120.325,111.933 IC3.41@120.325,110.163